# Altium PCB obc_comm.PcbDoc (part 1 of 3)
Units mm, origin at the board's own origin, x right, y up, seen from the top; angles counter-clockwise.
Board outline 95.89 x 90.17 mm, 4 copper layers (Top Signal, Ground Plane, Power Plane, Bottom Signal), stack 0.844 mm thick; 224 components, 179 nets, 944 pads, 422 vias.
Unrouted connection lines stored in the file: 348.
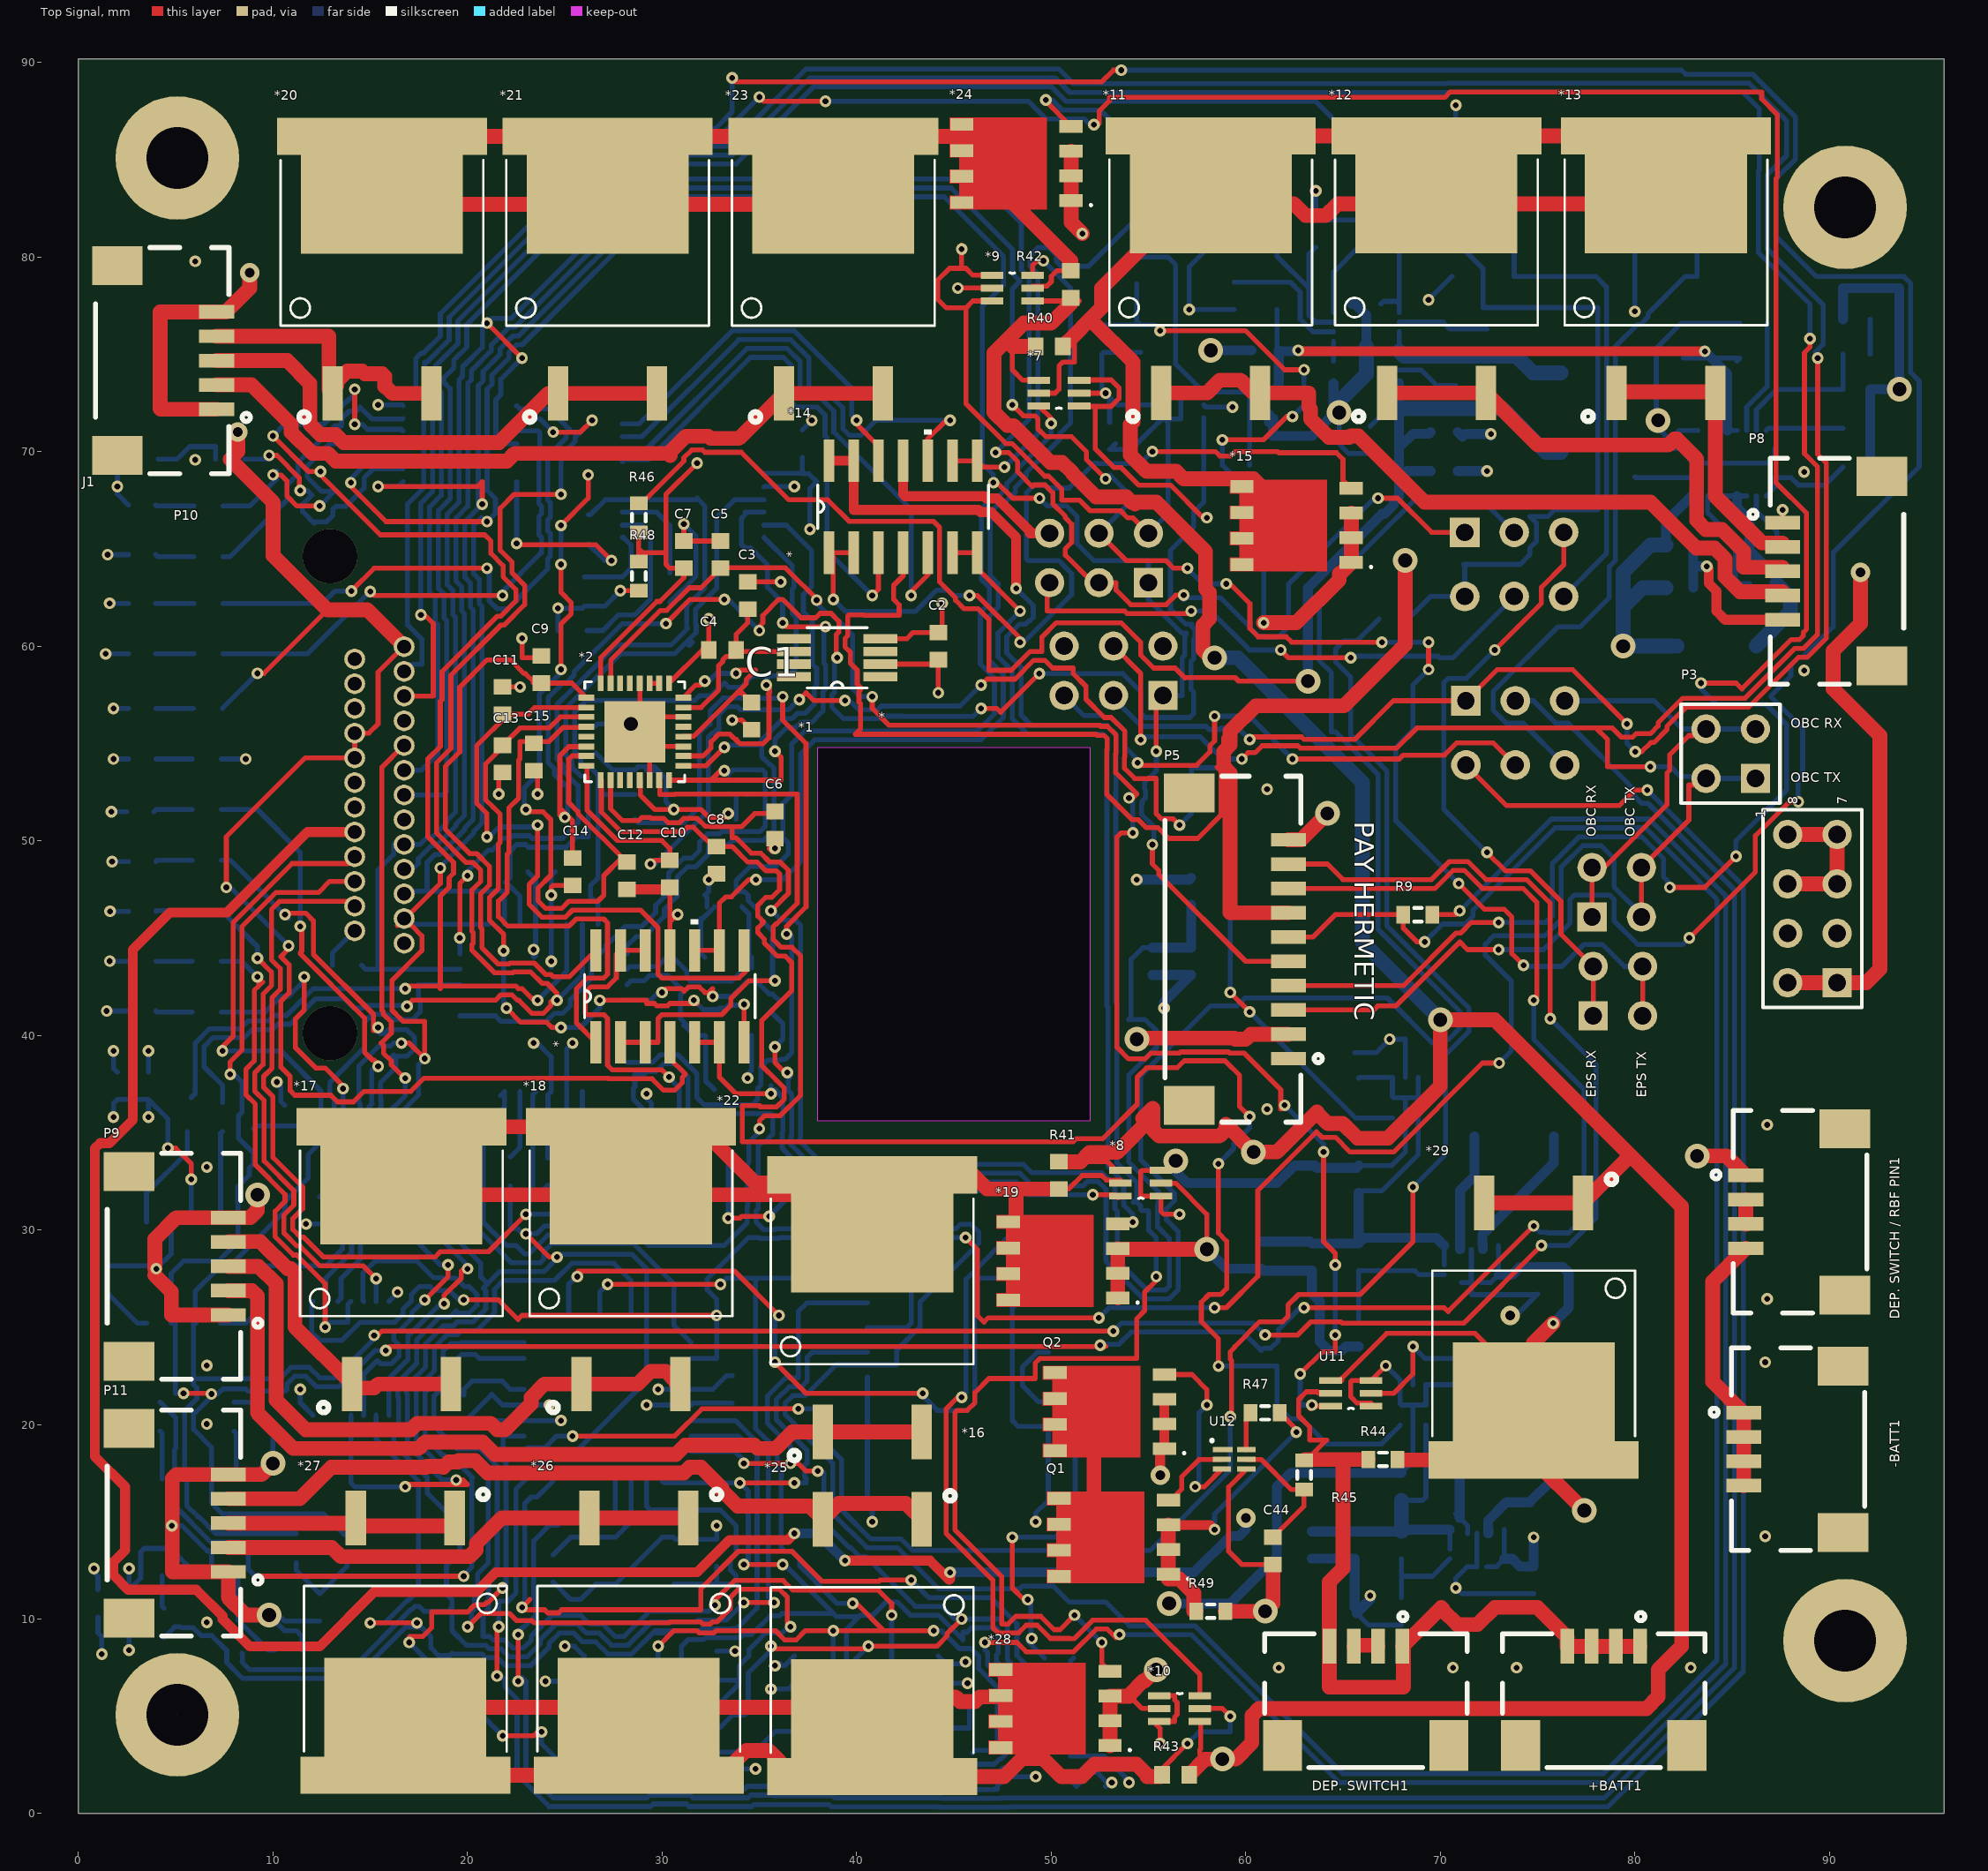
[diagram p0: Top Signal view]
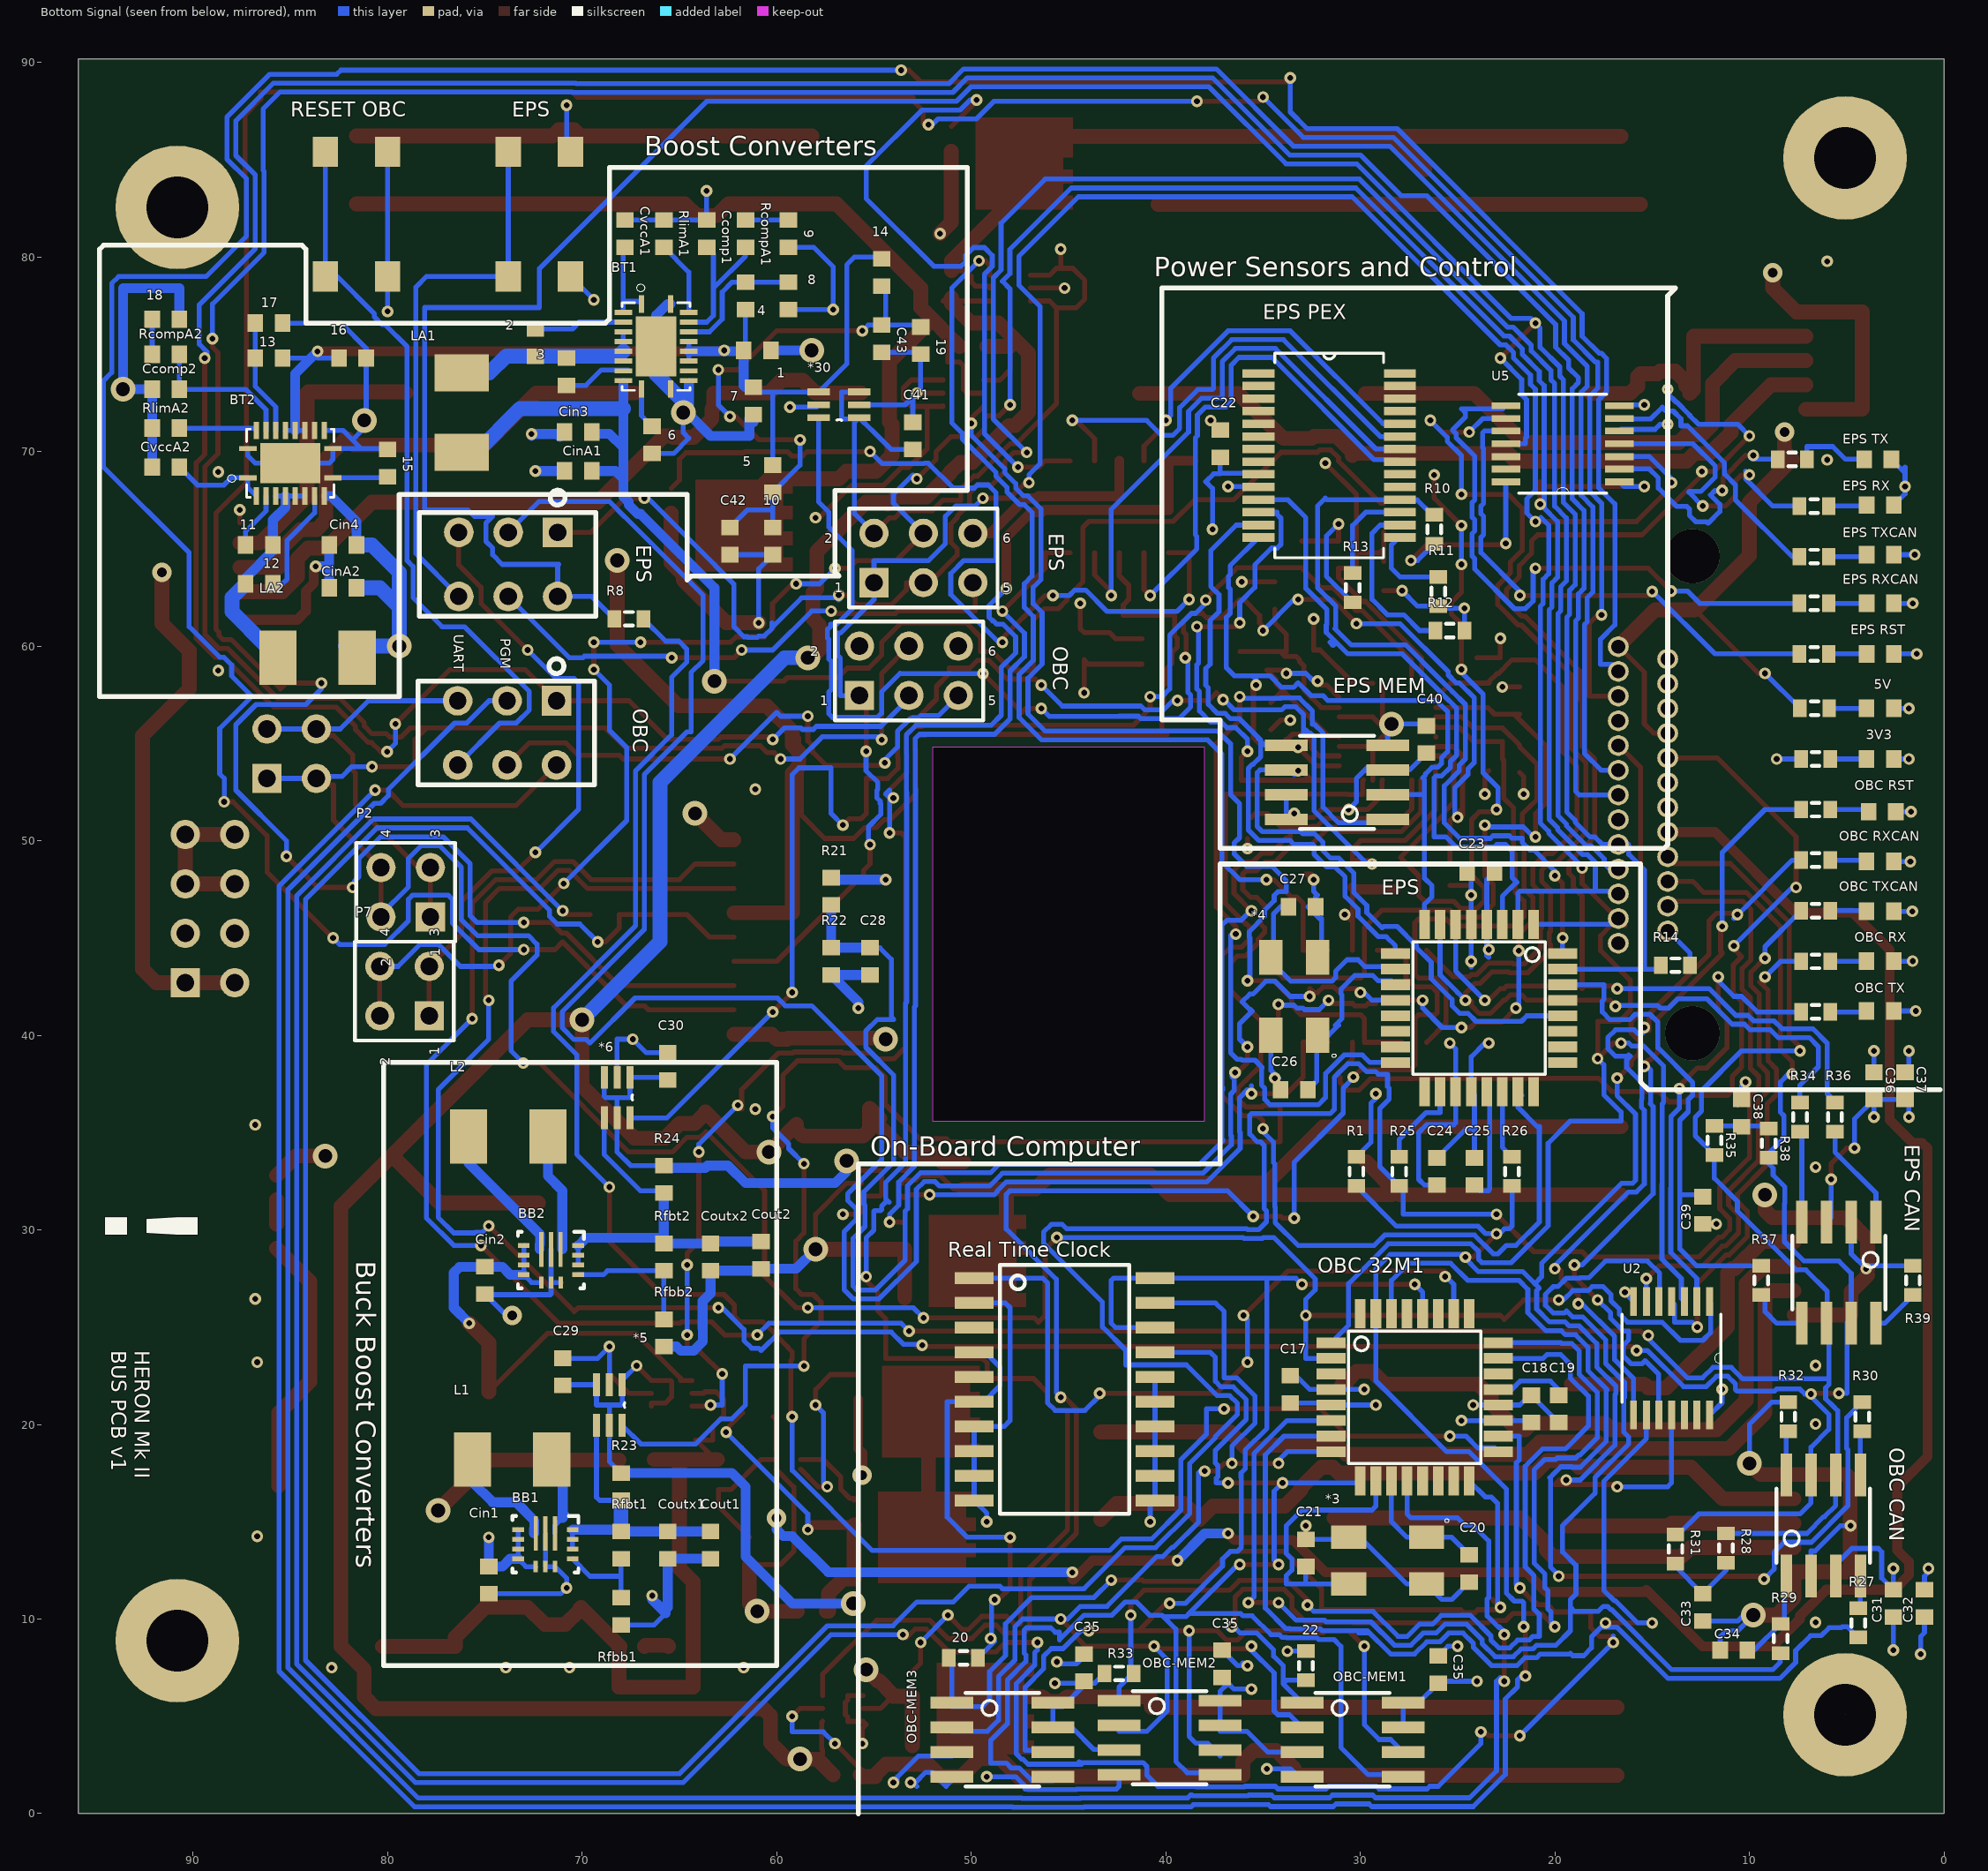
[diagram p1: Bottom Signal view, seen from below]
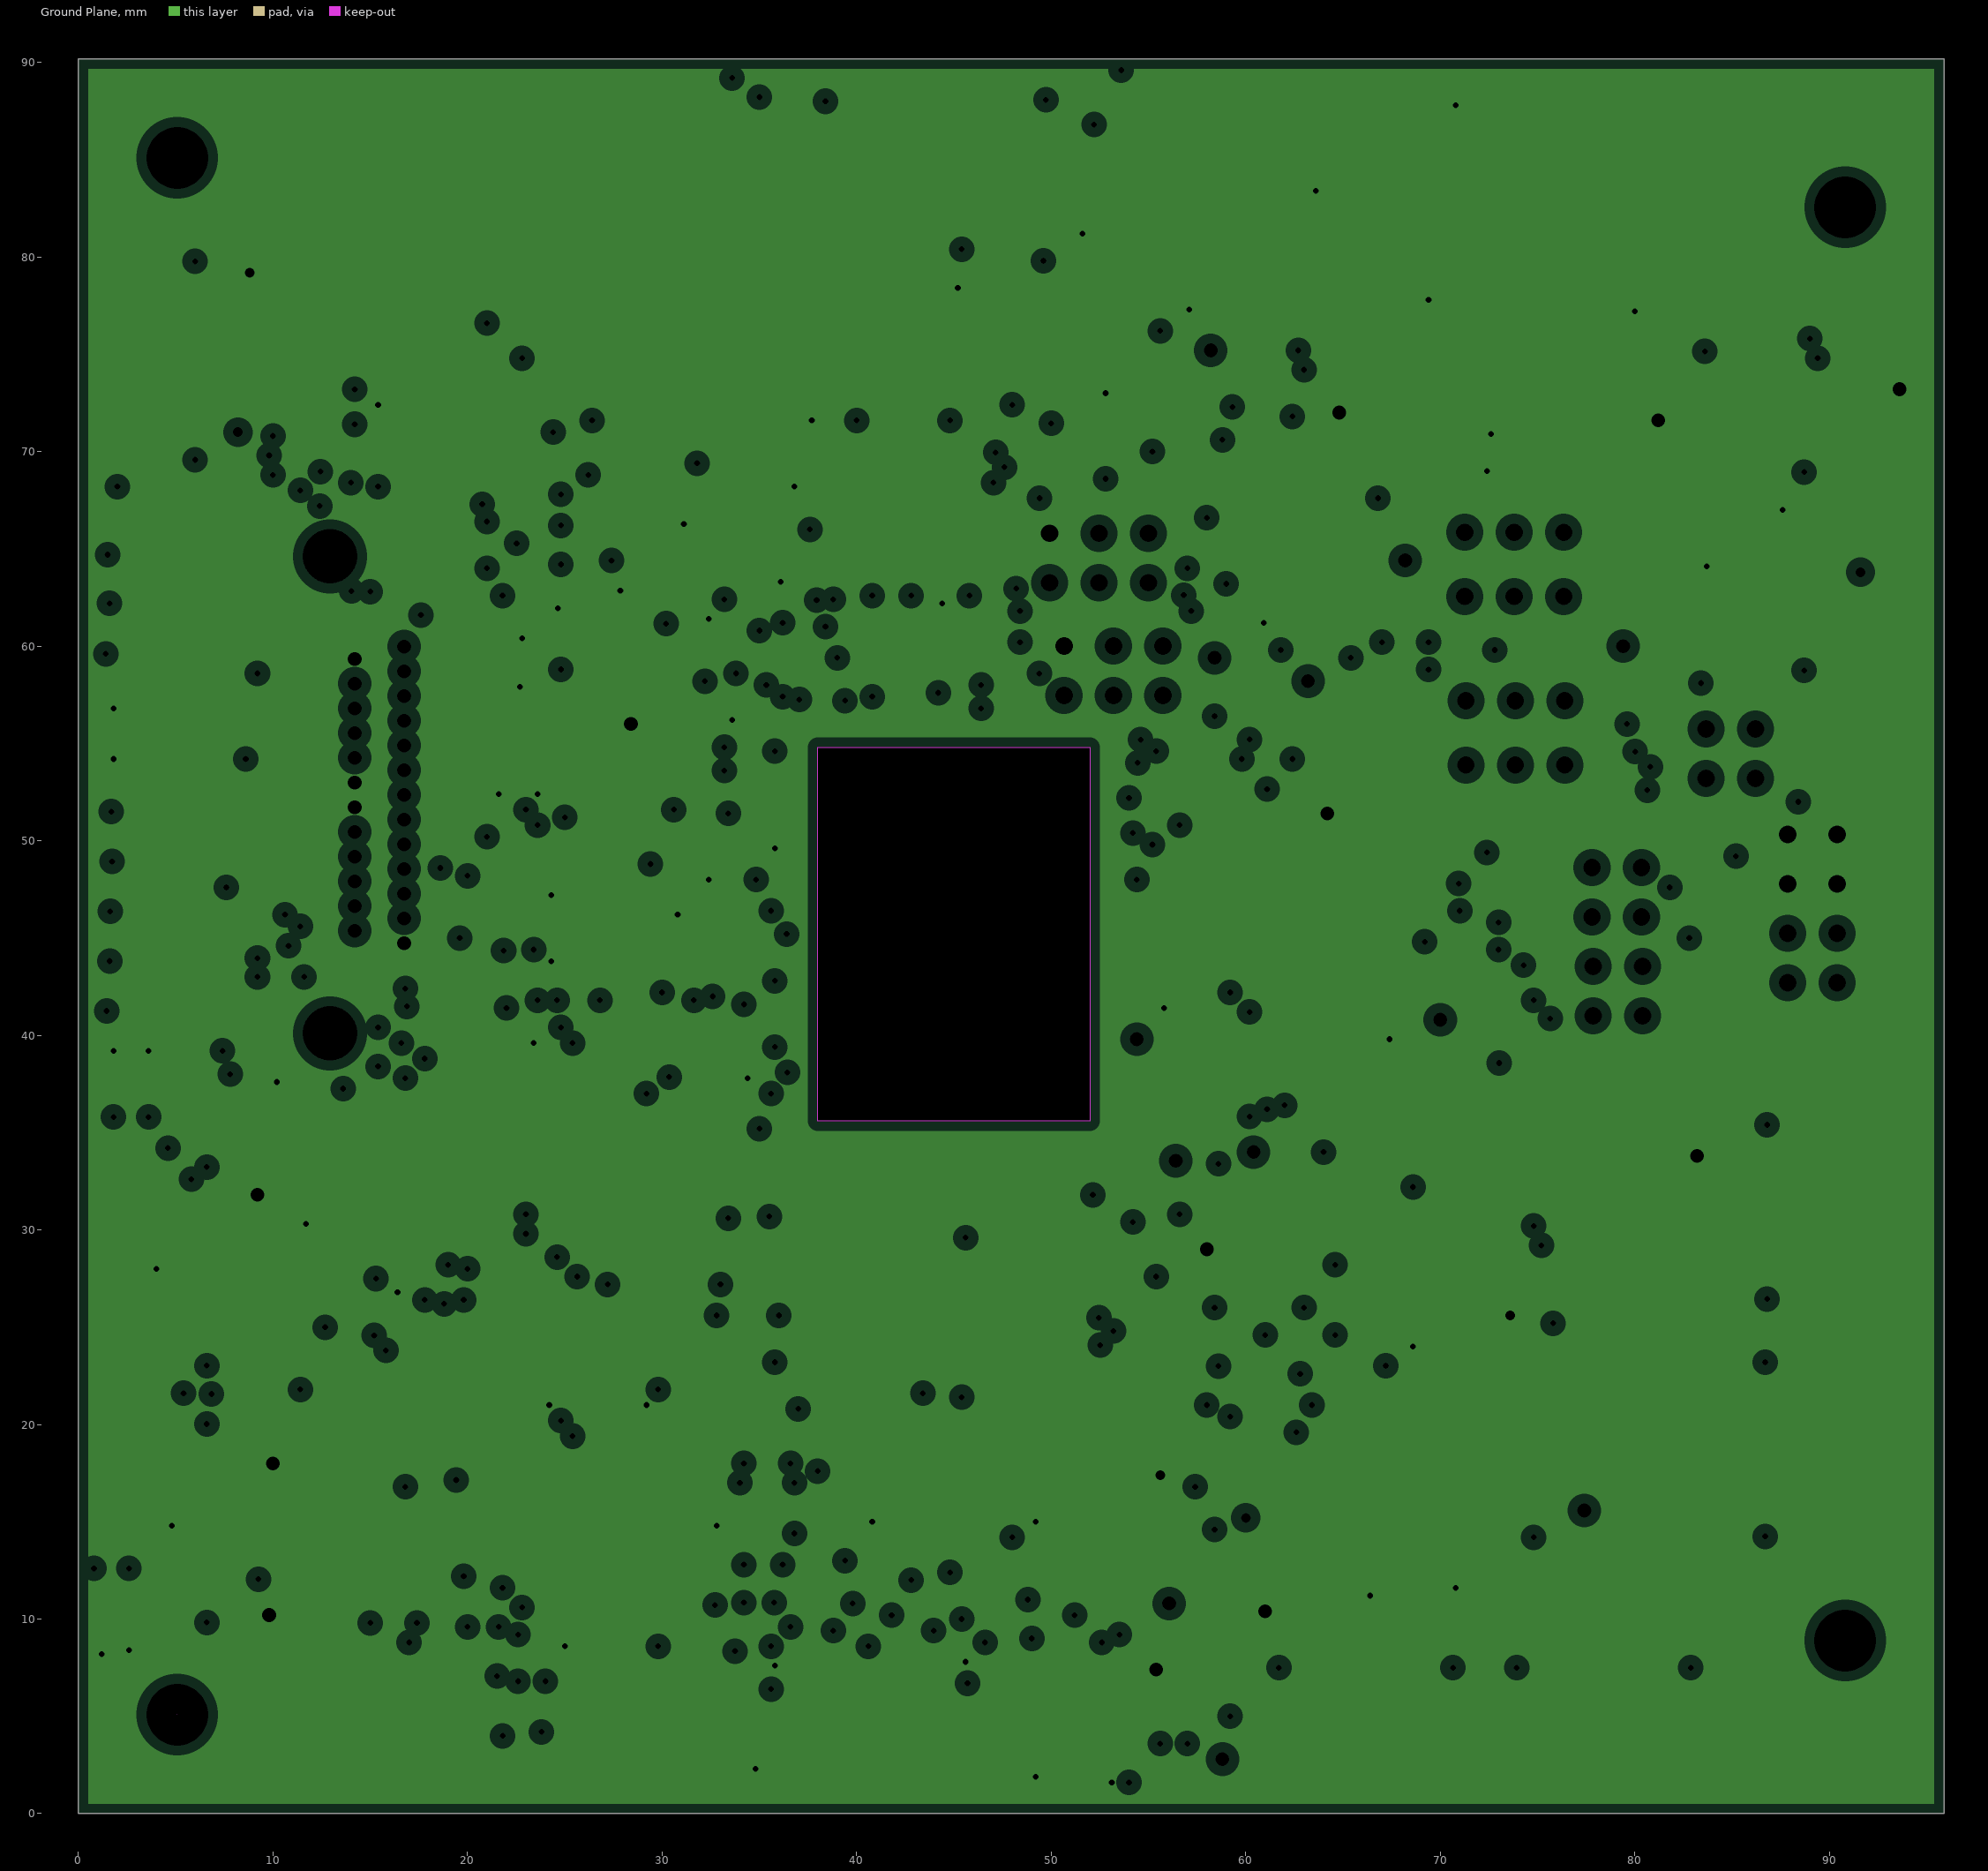
[diagram p2: Ground Plane, clearances drawn from the general rule]
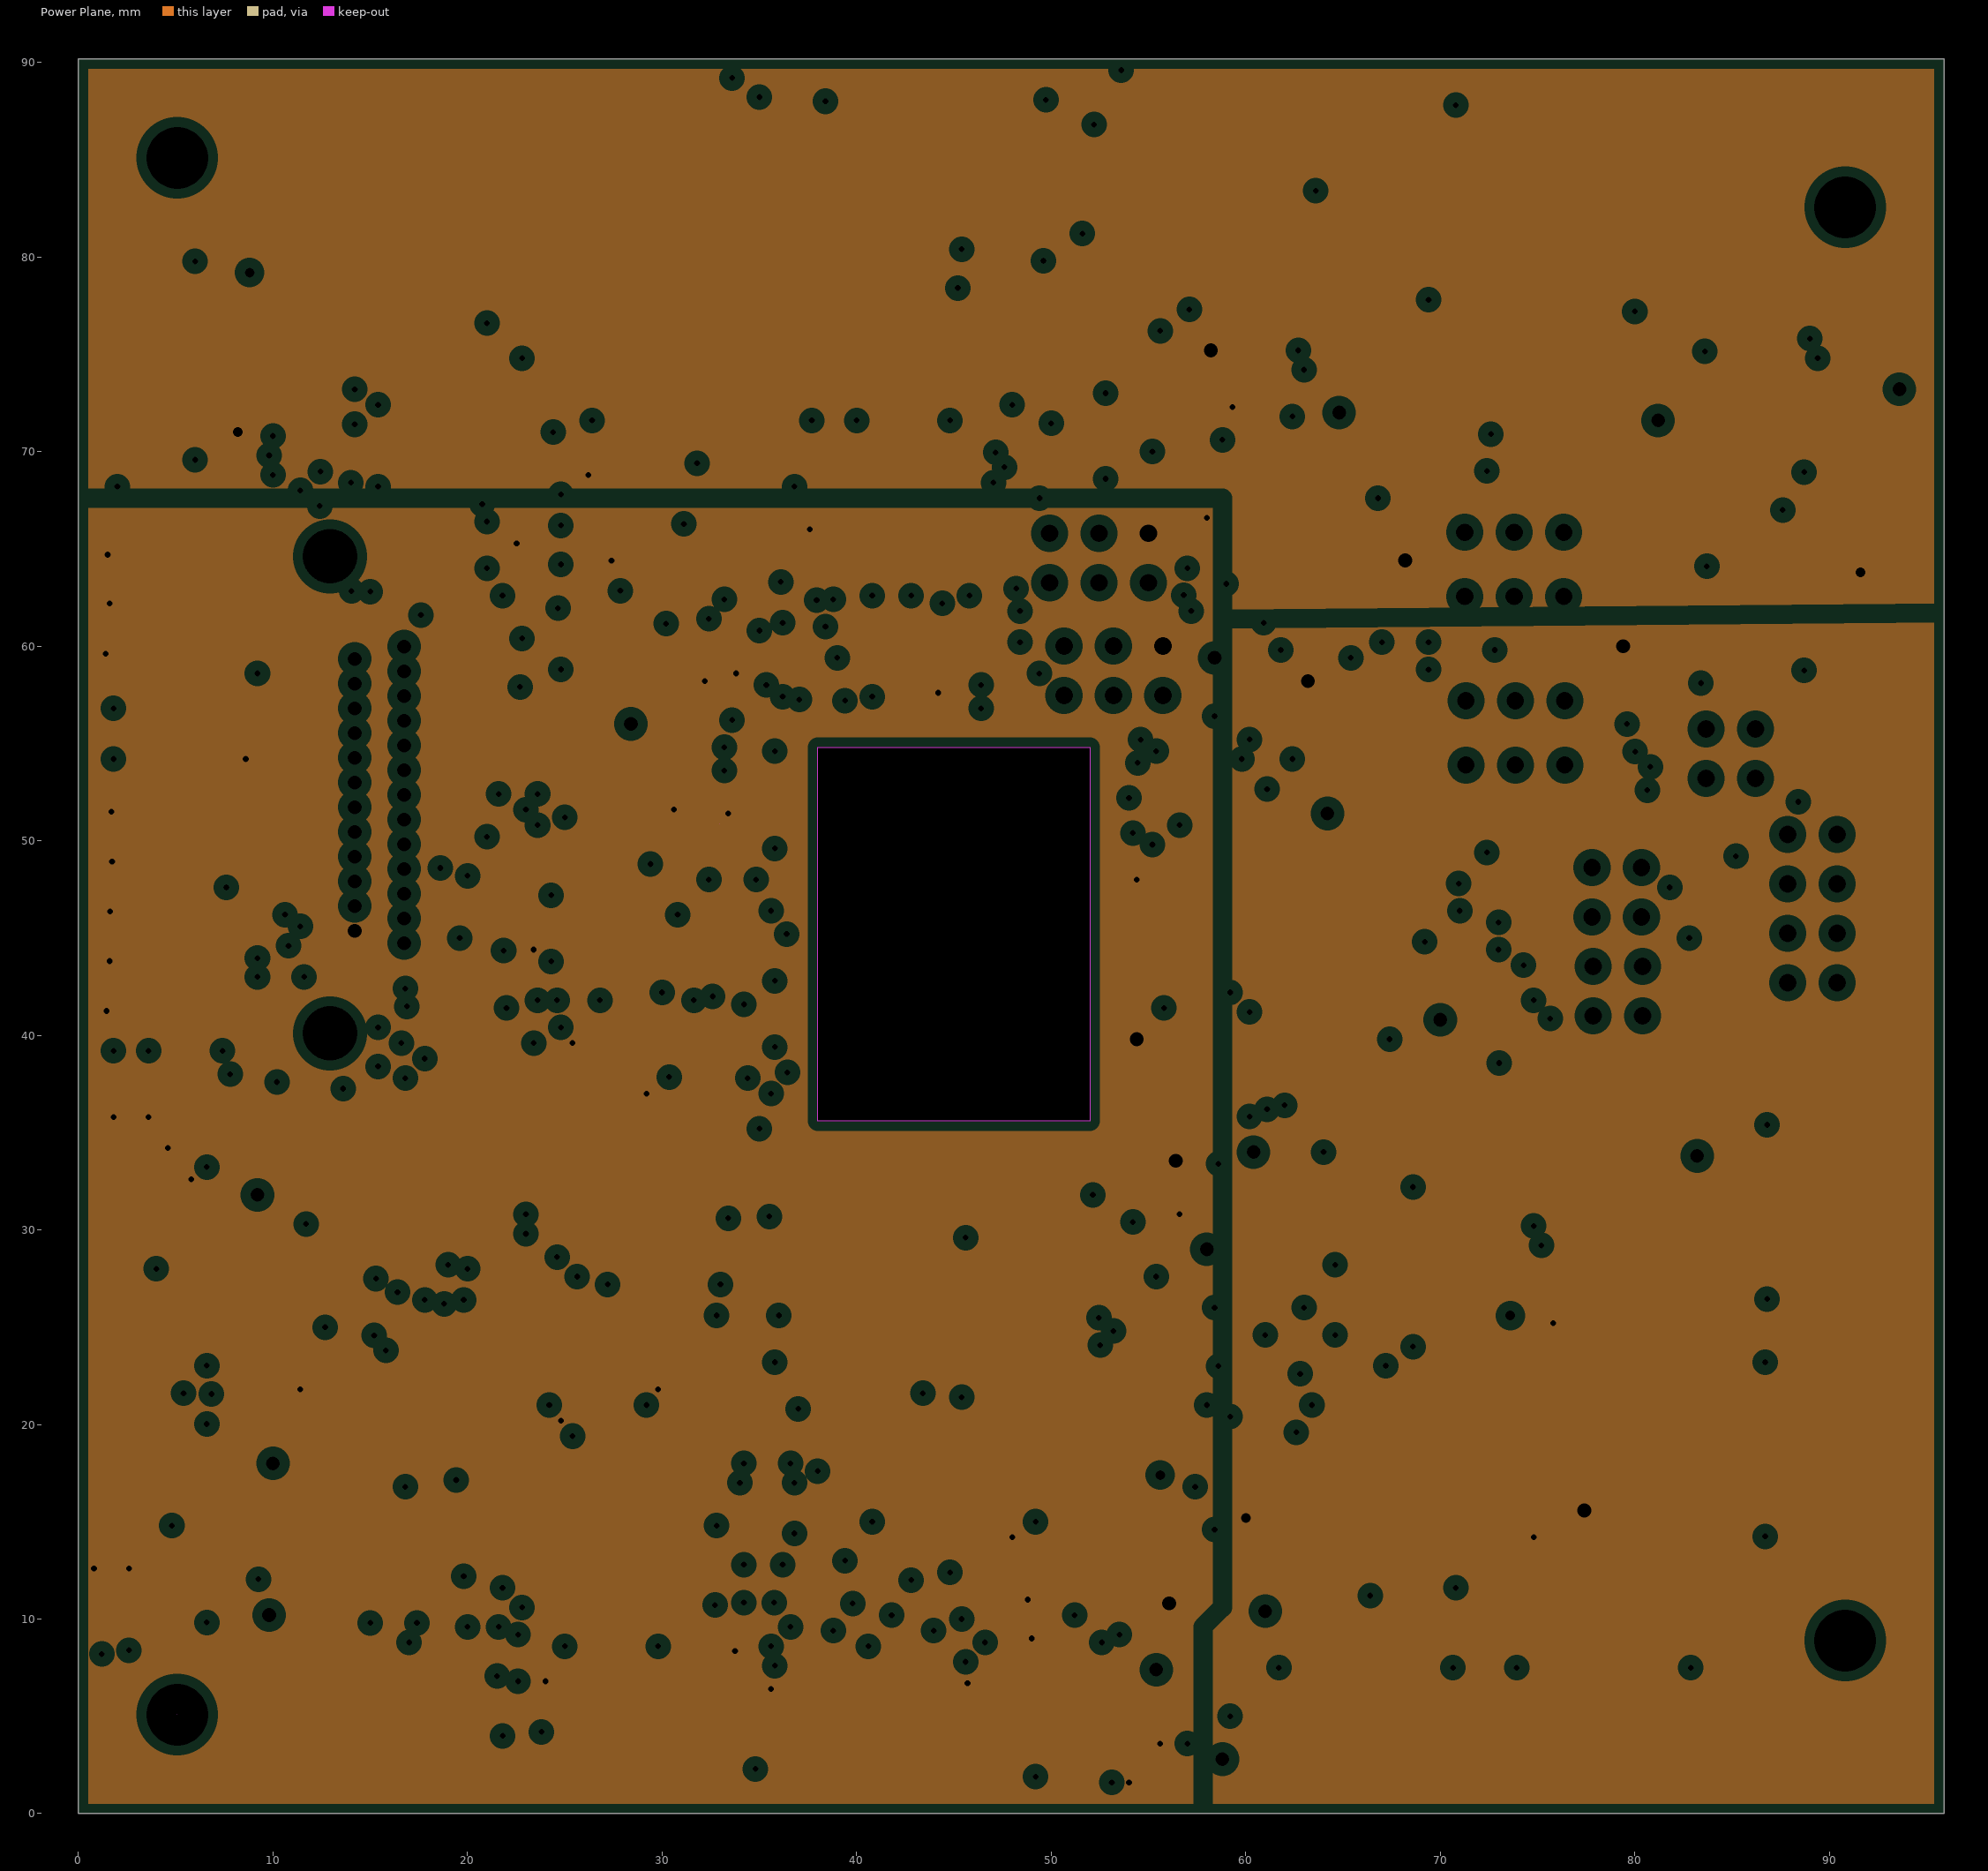
[diagram p3: Power Plane, clearances drawn from the general rule]

## Layer stack, top to bottom
Top Solder: solder mask 0.0102, Solder Resist, Dk 3.5
Top Signal: signal copper 0.0356
Dielectric 1: core 0.32, FR-4, Dk 4.8
Ground Plane: plane copper 0.036, net GND
Dielectric 3: prepreg 0.127, Dk 4.2
Power Plane: plane copper 0.036, net (Multiple Nets)
Dielectric 4: core 0.254, Dk 4.2
Bottom Signal: signal copper 0.0356
Bottom Solder: solder mask 0.0102, Solder Resist, Dk 3.5

## Board outline
0,0 0,90.17 95.89,90.17 95.89,0
cut-out: 38,35.6 38,54.8 52,54.8 52,35.6
cut-out: 5.08,5.08
cut-out: 32.967,50.85
cut-out: 5.08,5.08

## Design rules (kind name [scope] priority, off if disabled: settings)
AssemblyTestPointUsage [All] p1 off:
Clearance [All] p1: gap=0.254 ignorepadtopadclearanceinfootprint=TRUE except(0: Arc-Hole Track-Hole SMDPad-Hole THPad-Hole Via-Hole Fill-Hole Poly-Hole Region-Hole Text-Hole; 0.2: Arc-Arc Arc-Track Arc-SMDPad Track-Track Track-SMDPad)
FabricationTestPointUsage [All] p1 off: valid=0 allowmultiple=FALSE
FabricationTestpoint [All] p1 off: side=3 testpointundercomponent=TRUE minsize=1.016 maxsize=2.54 preferedsize=1.524 minholesize=0 maxholesize=1.016 preferedholesize=0.813 testpointgrid=0.025 allowsidetop=TRUE allowsidebottom=TRUE usegrid=TRUE gridtolerance=0
HoleSize [All] p1: absolutevalues=TRUE maxlimit=2.54 minlimit=0.3 maxpercent=80.000 minpercent=20.000
PlaneClearance [All] p1: clearance=0.508
PlaneConnect [All] p1: planeconnectstyle=Relief reliefexpansion=0.508 reliefentries=4 reliefconductorwidth=0.254 reliefairgap=0.254
PolygonConnect [All] p1: connectstyle=Relief reliefconductorwidth=0.254 reliefentries=4 polygonreliefangle="90 Angle" airgapwidth=0.254
RoutingVias [All] p1: holewidth=0.3 width=0.6 viastyle="Through Hole" minholewidth=0.3 minwidth=0.6 maxholewidth=0.711 maxwidth=1.27
SilkToSilkClearance [All] p1 off: silktosilkclearance=0.254
SilkToSolderMaskClearance [IsPad] p1 off: minsilkscreentomaskgap=0.254 clearancetoexposedcopper=TRUE
SolderMaskExpansion [All] p1: expansion=0.102
UnConnectedPin [All] p1 off:
UnRoutedNet UnRoutedNet_1 [All] p1:
UnRoutedNet [All] p2: checkbadconnections=TRUE
Width [All] p1: maxlimit=0.762 minlimit=0.254 preferedwidth=0.508 minimp=50.000000 maximp=50.000000 favimp=50.000000
21 further rules are at their usual default settings.

## Classes and differential pairs
component class U_obc_flash3: C35 OBC-MEM3
component class U_obc_flash2: C35 OBC-MEM2 R33
component class U_obc_flash1: C35 OBC-MEM1
component class U_eps_batt: +BATT1 -BATT1 C44 "DEP. SWITCH1" "DEP. SWITCH / RBF PIN1" Q1 Q2 R28 R45 R49 U11 U12
channel class obc_flash: U_obc_flash1 U_obc_flash2 U_obc_flash3
component class U_obc_rtc: "Real Time Clock"
component class U_obc_main_3: R8 R9
component class U_obc_can_transceiver: C23 C25 C33 C34 "OBC CAN" R28 R31 R32 R37 R38
component class U_obc_32m1: 3V3 *27 C17 C20 C40 C42 C44 C? OBC "OBC 32M1" "OBC RST" "OBC RX" "OBC RXCAN" "OBC TX" "OBC TXCAN" P10 P11 R1 R40 R41 R42 R49 "RESET OBC" U11
component class U_eps_pv: *1 *2 *5 *6 *8 *9 *10 *11 *13 *14 *15 *16 *18 *19 *21 *22 *23 *24 *25 *28 *29 *30 EPS P9 P10 P11 R41 R42
component class U_eps_pex: C17 "EPS PEX" R9 R11 R44 R45
component class U_eps_flash: C40 "EPS MEM"
component class U_eps_digital: R31
component class U_eps_can_transceiver: C34 C36 C38 C39 "EPS CAN" R34 R37 R38
component class U_eps_bt2: 1 2 3 4 5 7 10 18 19 BT2 C43 Ccomp2 Cin1 CinA2 CvccA1 RcompA2 RlimA1
component class U_eps_bt1: 2 4 5 6 7 8 9 10 13 18 *30 BT2 C34 C42 Ccomp2 Cin1 CinA2 CvccA1 RcompA2 RlimA1
component class U_eps_bb2: *6 BB2 C24 Cin2 Cout2 Coutx2 L2 R9 Rfbb2 Rfbt2
component class U_eps_bb1: *5 BB1 C17 C40 Cin1 Cout1 Coutx1 L1 R14 R22 R31 Rfbb1 Rfbt1
component class U_eps_adc: *8 *11 C1 C2 C3 C4 C5 C6 C7 C8 C9 C11 C12 C13 C14 C15
component class U_eps_32m1: *25 C17 C24 C26 C27 C43 EPS "EPS RST" "EPS RX" "EPS RXCAN" "EPS TX" "EPS TXCAN" P10 R1 R8 R14 R22 S4 U5
component class bus-main: EPS P5 P9 P?

## Components (designator, comment, footprint, x,y, rotation, side; value= is the part's Value field where it differs from the comment)
1 "R17" 1608[0603] 61,75.2 r180 bottom value=10m
2 "RtA1" 1608[0603] 72.4,75.6 r90 bottom value=267kOhm
3 "CbstA1" 1608[0603] 70.8,74.1 r270 bottom value=100nF
3V3 "LED2" 1608[0603] 3.278,54.2 r180 bottom (schematic designator D6)
4 "RfbtA1" 1608[0603] 61.6,78 r270 bottom value=220kOhm
5 "R19" 1608[0603] 60.2,68.6 r90 bottom value=R_Small
5V "Res3" J1-0603 6.65,56.8 r180 bottom value=1K (schematic designator R20)
6 "CssA1" 1608[0603] 66.4,70.6 r90 bottom
7 "CoutA1" 1608[0603] 61.2,72.6 r90 bottom value=47uF
8 "RfbbA1" 1608[0603] 59.4,78 r90 bottom value=69.8kOhm
9 "" 1608[0603] 59.4,81.2 r90 bottom value=CcompA1
10 "R20" 1608[0603] 60.2,65.4 r90 bottom value=R_Small
11 "RtA1" 1608[0603] 86.6,65.2 r0 bottom value=267kOhm
12 "CbstA1" 1608[0603] 86.6,63.2 r180 bottom value=100nF
13 "RfbtA1" 1608[0603] 86.1,74.8 r180 bottom value=220kOhm
14 "R19" 1608[0603] 54.6,79.2 r90 bottom value=R_Small
15 "CssA1" 1608[0603] 80,69.4 r270 bottom
16 "CoutA1" 1608[0603] 81.8,74.8 r0 bottom value=47uF
17 "RfbbA1" 1608[0603] 86.1,76.6 r0 bottom value=69.8kOhm
18 "" 1608[0603] 91.4,76.8 r0 bottom value=CcompA1
19 "R20" 1608[0603] 52.6,75.7 r90 bottom value=R_Small
20 "" J1-0603 50.4,8 r0 bottom value=30K
22 "" J1-0603 32.8,7.6 r90 bottom value=30K
*1 "REF5025" DGK8-M 39,59.4 r180 top
*2 "ADS7952" QFN50P500X500X100-32N 28.6,55.6 r270 top
*3 "ABM3B-8.000MHz" OSCSC500X320X110-4N 28.6,13 r270 bottom
*4 "ABM3B-8.000MHz" OSCSC500X320X110-4N 33.4,42 r0 bottom
*5 "INA214" SOT65P210X110-6N 68.6,21 r270 bottom
*6 "INA214" SOT65P210X110-6N 68.2,36.8 r270 bottom
*7 "INA214" SOT65P210X110-6N 50.4,73 r180 top
*8 "INA214" SOT65P210X110-6N 54.6,32.4 r180 top
*9 "INA214" SOT65P210X110-6N 48,78.4 r0 top
*10 "INA214" SOT65P210X110-6N 56.6,5.4 r0 top
*11 "SM74611" TO254P1435X464-3N 58.2,79.2 r90 top
*12 "SM74611" TO254P1435X464-3N 69.8,79.2 r90 top
*13 "SM74611" TO254P1435X464-3N 81.6,79.2 r90 top
*14 "ADA4891-4" R_14 42.39,67.162 r90 top
*15 "BSC026NE2LS5" INF-PG-TDSON-8-1_V 62.6,66.2 r90 top
*16 "SM74611" TO254P1435X464-3N 40.8,25.8 r90 top
*17 "SM74611" TO254P1435X464-3N 16.6,28.27 r90 top
*18 "SM74611" TO254P1435X464-3N 28.4,28.27 r90 top
*19 "BSC026NE2LS5" INF-PG-TDSON-8-1_V 50.6,28.4 r90 top
*20 "SM74611" TO254P1435X464-3N 15.6,79.175 r90 top
*21 "SM74611" TO254P1435X464-3N 27.2,79.175 r90 top
*22 "ADA4891-4" R_14 30.4,42 r90 top
*23 "SM74611" TO254P1435X464-3N 38.8,79.175 r90 top
*24 "BSC026NE2LS5" INF-PG-TDSON-8-1_V 48.2,84.8 r90 top
*25 "SM74611" TO254P1435X464-3N 40.8,8.93 r270 top
*26 "SM74611" TO254P1435X464-3N 28.8,9 r270 top
*27 "SM74611" TO254P1435X464-3N 16.8,9 r270 top
*28 "BSC026NE2LS5" INF-PG-TDSON-8-1_V 50.2,5.4 r90 top
*29 "SM74611" TO254P1435X464-3N 74.8,25.2 r270 top
*30 "INA214" SOT65P210X110-6N 56.8,72.4 r0 bottom
+BATT1 "J5" DF14-4P-1.25H(55) 78.4,8.6 r180 top
-BATT1 "J6" DF14-4P-1.25H(55) 85.6,18.725 r270 top
BB1 "TPS630250" RNC0014A 71.89,13.845 r270 bottom
BB2 "TPS630250" RNC0014A 71.6,28.445 r270 bottom
BT1 "TPS61088" QFN50P450X350X100-21N 66.2,75.4 r180 bottom
BT2 "TPS61088" QFN50P450X350X100-21N 85,69.4 r90 bottom
C1 "Cap Semi" 1608[0603] 34.6,56.4 r270 top value=1uF
C2 "Cap Semi" 1608[0603] 44.2,60 r270 top value=1uF
C3 "Cap Semi" 1608[0603] 34.4,62.6 r270 top value=1uF
C4 "Cap Semi" 1608[0603] 33.1,59.8 r180 top value=10uF
C5 "Cap Semi" 1608[0603] 33,64.7 r90 top value=150pF
C6 "Cap Semi" 1608[0603] 35.8,50.8 r270 top value=150pF
C7 "Cap Semi" 1608[0603] 31.12,64.7 r90 top value=150pF
C8 "Cap Semi" 1608[0603] 32.8,49 r270 top value=150pF
C9 "Cap Semi" 1608[0603] 23.8,58.8 r90 top value=150pF
C10 "Cap Semi" 1608[0603] 30.4,48.3 r270 top value=150pF
C11 "Cap Semi" 1608[0603] 21.8,57.2 r90 top value=150pF
C12 "Cap Semi" 1608[0603] 28.2,48.2 r270 top value=150pF
C13 "Cap Semi" 1608[0603] 21.8,54.2 r270 top value=150pF
C14 "Cap Semi" 1608[0603] 25.4,48.4 r270 top value=150pF
C15 "Cap Semi" 1608[0603] 23.4,54.3 r270 top value=150pF
C17 "Cap Semi" 1608[0603] 33.6,21.8 r90 bottom value=0.1uF
C18 "Cap Semi" 1608[0603] 21.2,20.8 r270 bottom value=0.1uF
C19 "Cap Semi" 1608[0603] 19.8,20.8 r270 bottom value=0.1uF
C20 "1%" 1608[0603] 24.4,12.6 r90 bottom value=22pF
C21 "1%" 1608[0603] 32.8,13.4 r270 bottom value=22pF
C22 "Cap Semi" 1608[0603] 37.2,70.4 r270 bottom value=100nF
C23 "Cap Semi" 1608[0603] 23.8,48.4 r180 bottom value=0.1uF
C24 "Cap Semi" 1608[0603] 26.067,33 r270 bottom value=0.1uF
C25 "Cap Semi" 1608[0603] 24.133,33 r90 bottom value=0.1uF
C26 "1%" 1608[0603] 33.4,37.2 r180 bottom value=22pF
C27 "1%" 1608[0603] 33,46.6 r0 bottom value=22pF
C28 "Cap" 1608[0603] 55.2,43.8 r90 bottom value=Csmall
C29 "Cap Semi" 1608[0603] 71,22.7 r270 bottom value=0.1uF
C30 "Cap Semi" 1608[0603] 65.6,38.4 r270 bottom value=0.1uF
C31 "Cap Semi" 1608[0603] 2.6,10.8 r90 bottom value=10uF
C32 "Cap Semi" 1608[0603] 1,10.8 r90 bottom value=0.1uF
C33 "Ceramic" 1608[0603] 12.4,10.6 r90 bottom value="47 nF"
C34 "0.1uF" 1608[0603] 10.8,8.4 r180 bottom
C35 "Cap Semi" 1608[0603] 44.2,7.5 r90 bottom value=100nF
C35 "Cap Semi" 1608[0603] 37.1,7.7 r90 bottom value=100nF
C35 "Cap Semi" 1608[0603] 26,7.4 r90 bottom value=100nF
C36 "Cap Semi" 1608[0603] 3.6,37.4 r270 bottom value=10uF
C37 "Cap Semi" 1608[0603] 2,37.4 r270 bottom value=0.1uF
C38 "Ceramic" 1608[0603] 10.4,36 r270 bottom value="47 nF"
C39 "0.1uF" 1608[0603] 12.4,31 r90 bottom
C40 "Cap Semi" 1608[0603] 26.6,55.2 r90 bottom value=100nF
C41 "Cap Semi" 1608[0603] 53,70.8 r270 bottom value=0.1uF
C42 "" 1608[0603] 62.4,65.4 r270 bottom value=C_Small
C43 "" 1608[0603] 54.6,75.8 r270 bottom value=C_Small
C44 "Cap Semi" 1608[0603] 61.4,13.5 r90 top value=0.1uF
Ccomp1 "" 1608[0603] 63.6,81.2 r270 bottom value=82pF
Ccomp2 "" 1608[0603] 91.4,73.2 r180 bottom value=82pF
Cin1 "Cap" 1608[0603] 74.8,12 r90 bottom value=10.0µF
Cin2 "Cap" 1608[0603] 75,27.4 r90 bottom value=10.0µF
Cin3 "" 1608[0603] 70.2,71 r180 bottom value=100nF
Cin4 "" 1608[0603] 82.3,65.2 r180 bottom value=100nF
CinA1 "" 1608[0603] 70.2,69 r180 bottom value=12uF
CinA2 "" 1608[0603] 82.3,63 r180 bottom value=12uF
Cout1 "Cap" 1608[0603] 63.4,13.8 r90 bottom value=47.0µF
Cout2 "Cap" 1608[0603] 60.8,28.7 r90 bottom value=47.0µF
Coutx1 "Cap" 1608[0603] 65.6,13.8 r90 bottom value=10.0µF
Coutx2 "Cap" 1608[0603] 63.4,28.6 r90 bottom value=10.0µF
CvccA1 "" 1608[0603] 67.8,81.2 r270 bottom value=1uF
CvccA2 "" 1608[0603] 91.4,69.2 r180 bottom value=1uF
D12 "LED2" 1608[0603] 3.278,56.8 r180 bottom
"DEP. SWITCH1" "Header 4" DF14-4P-1.25H(55) 66.175,8.6 r180 top
"DEP. SWITCH / RBF PIN1" "Header 4" DF14-4P-1.25H(55) 85.7,30.925 r270 top
Designator1 "Comment" OSCSC500X320X110-4N 184.6,2508.4 r0 top
EPS "SW-DPDT" DPST_32m1_switch 73.8,64.2 r270 bottom (schematic designator S3)
EPS "ATMega32M1" QFP80P900X900X120-32N 23.9,41.4 r270 bottom (schematic designator U4)
EPS "SW-PB" SW415-ND 72.2,82.2 r90 bottom (schematic designator S4)
EPS "3x2 Male/IDC" HDR2X3 55,63.26 r180 bottom (schematic designator P6)
"EPS CAN" "SN65HVD233D" SOIC127P500X600-8N 5.4,27.8 r0 bottom (schematic designator U8)
"EPS MEM" "SST26VF016B" SOIC127P500X600-8N 31.2,53 r90 bottom (schematic designator U9)
"EPS PEX" "MCP23S17" SOP65P780X200-28N 31.6,69.8 r180 bottom (schematic designator U3)
"EPS RST" "RST" 1608[0603] 3.273,59.6 r0 bottom (schematic designator D7)
"EPS RX" "RXLIN" 1608[0603] 3.273,67.25 r0 bottom (schematic designator D10)
"EPS RXCAN" "RXCAN" 1608[0603] 3.273,62.2 r0 bottom (schematic designator D8)
"EPS TX" "TXLIN" 1608[0603] 3.4,69.6 r0 bottom (schematic designator D11)
"EPS TXCAN" "TXCAN" 1608[0603] 3.273,64.7 r0 bottom (schematic designator D9)
J1 "D Connector 25" "Mini DSub Connector" 16.74,52.355 r90 top
L1 "Inductor" 541-1082-1-ND 73.6,18.2 r180 bottom value=1.0µH
L2 "Inductor" 541-1082-1-ND 73.8,34.8 r180 bottom value=1.0µH
LA1 "" 541-1082-1-ND 76.2,72 r90 bottom value=2.2uH
LA2 "" 541-1082-1-ND 83.6,59.4 r0 bottom value=2.2uH
OBC "SW-DPDT" DPST_32m1_switch 73.86,55.54 r270 bottom (schematic designator S1)
OBC "3x2 Male/IDC" HDR2X3 55.74,57.46 r180 bottom (schematic designator P1)
"OBC 32M1" "ATMega32M1" QFP80P900X900X120-32N 27.2,21.4 r180 bottom (schematic designator U1)
"OBC CAN" "SN65HVD233D" SOIC127P500X600-8N 6.2,14.8 r180 bottom (schematic designator U6)
"OBC RST" "RST" 1608[0603] 3.178,51.49 r0 bottom (schematic designator D1)
"OBC RX" "RXLIN" 1608[0603] 3.278,43.81 r0 bottom (schematic designator D4)
"OBC RXCAN" "RXCAN" 1608[0603] 3.278,48.93 r0 bottom (schematic designator D2)
"OBC TX" "UHF PWR" HDR2X4 90.4,42.7 r90 top (schematic designator P4)
"OBC TX" "TXLIN" 1608[0603] 3.278,41.25 r0 bottom (schematic designator D5)
"OBC TXCAN" "TXCAN" 1608[0603] 3.278,46.37 r0 bottom (schematic designator D3)
OBC-MEM1 "SST26VF016B" SOIC127P500X600-8N 30.4,3.8 r270 bottom (schematic designator U7)
OBC-MEM2 "SST26VF016B" SOIC127P500X600-8N 39.8,3.9 r270 bottom (schematic designator U7)
OBC-MEM3 "SST26VF016B" SOIC127P500X600-8N 48.4,3.8 r270 bottom (schematic designator U7)
P2 "2x2 Female" HDR2X2 77.8,46.08 r90 bottom
P3 "UHF UART" HDR2X2 86.2,53.2 r90 top
P5 "Header 10" "DF14-10P-1.25H(55) - duplicate" 62.2,44.425 r90 top
P7 "2x2 Female" HDR2X2 77.86,41 r90 bottom
P8 "Header 5" "DF14-4P-1.25H(55) - duplicate" 87.6,63.85 r270 top
P9 "Header 5" "DF14-4P-1.25H(55) - duplicate" 7.7,28.125 r90 top
P10 "Header 5" "DF14-4P-1.25H(55) - duplicate" 7.1,74.675 r90 top
P11 "Header 5" "DF14-4P-1.25H(55) - duplicate" 7.7,14.925 r90 top
Q1 "BSC026NE2LS5" INF-PG-TDSON-8-1_V 53.2,14.2 r90 top
Q2 "BSC026NE2LS5" INF-PG-TDSON-8-1_V 52.994,20.66 r90 top
R1 "" J1-0603 30.2,33 r90 bottom value=30K
R2 "Res3" J1-0603 6.6,51.6 r180 bottom value=330
R3 "Res3" J1-0603 6.6,49 r180 bottom value=330
R4 "Res3" J1-0603 6.6,46.4 r180 bottom value=330
R5 "Res3" J1-0603 6.6,43.8 r180 bottom value=330
R6 "Res3" J1-0603 6.6,41.2 r180 bottom value=330
R7 "Res3" J1-0603 6.6,54.2 r180 bottom value=1K
R8 "Res3" J1-0603 67.6,61.4 r180 bottom value=0
R9 "Res3" J1-0603 68.85,46.2 r0 top value=0
R10 "Res3" J1-0603 26.2,66 r90 bottom value=10K
R11 "Res3" J1-0603 26,62.8 r90 bottom value=1K
R12 "Res3" J1-0603 25.4,60.8 r0 bottom value=10K
R13 "Res3" J1-0603 30.4,63 r90 bottom value=10K
R14 "" J1-0603 13.8,43.6 r180 bottom value=30K
R15 "Res3" J1-0603 6.673,59.6 r180 bottom value=330
R16 "Res3" J1-0603 6.673,62.2 r180 bottom value=330
R17 "Res3" J1-0603 6.673,64.6 r180 bottom value=330
R18 "Res3" J1-0603 6.673,67.2 r180 bottom value=330
R19 "Res3" J1-0603 7.8,69.6 r180 bottom value=330
R21 "Res1" 1608[0603] 57.2,47.4 r270 bottom value=Rsmall
R22 "Res1" 1608[0603] 57.2,43.8 r270 bottom value=Rsmall
R23 "Res1" 1608[0603] 68,16.8 r90 bottom value=10mO
R24 "Res1" 1608[0603] 65.8,32.6 r90 bottom value=10mO
R25 "Res3" J1-0603 28,33 r90 bottom value=0
R26 "Res3" J1-0603 22.2,33 r90 bottom value=0
R27 "" J1-0603 4.4,9.8 r270 bottom value=100
R28 "0603" J1-0603 11.2,13.65 r270 bottom value="60 Ohm"
R29 "" J1-0603 8.4,9 r270 bottom value=100
R30 "100" J1-0603 4.2,20.4 r90 bottom
R31 "0603" J1-0603 13.8,13.6 r270 bottom value=60
R32 "" J1-0603 8,20.4 r270 bottom value="0 Ohm"
R33 "" J1-0603 42.4,7.2 r0 bottom value=30K
R34 "" J1-0603 7.4,35.8 r90 bottom value=100
R35 "0603" J1-0603 11.8,34.6 r90 bottom value="60 Ohm"
R36 "" J1-0603 5.6,35.8 r90 bottom value=100
R37 "100" J1-0603 9.4,27.4 r90 bottom
R38 "0603" J1-0603 9,34.45 r90 bottom value=60
R39 "" J1-0603 1.6,27.4 r270 bottom value="0 Ohm"
R40 "Res1" 1608[0603] 49.9,75.4 r180 top value=10mO
R41 "Res1" 1608[0603] 50.4,32.8 r90 top value=10mO
R42 "Res1" 1608[0603] 51,78.6 r270 top value=10mO
R43 "Res1" 1608[0603] 56.4,2 r0 top value=10mO
R44 "Res3" J1-0603 67.05,18.2 r180 top value=10m
R45 "Res3" J1-0603 63,17.4 r90 top value=330
R46 "Res3" J1-0603 28.8,66.6 r90 top
R47 "Res3" J1-0603 61,20.6 r180 top value=2.2K
R48 "Res3" J1-0603 28.8,63.6 r90 top
R49 "Res3" J1-0603 58.2,10.4 r0 top value=0
RcompA1 "" 1608[0603] 61.6,81.2 r270 bottom value=15.8kOhm
RcompA2 "" 1608[0603] 91.4,75 r180 bottom value=15.8kOhm
"Real Time Clock" "DS3234" SOIC127P1032X265-20N 45.2,21.8 r180 bottom (schematic designator U10)
"RESET OBC" "SW-PB" SW415-ND 81.6,82.2 r90 bottom (schematic designator S2)
Rfbb1 "Res1" 1608[0603] 68,10.4 r90 bottom value=180kO
Rfbb2 "Res1" 1608[0603] 65.8,24.7 r90 bottom value=180kO
Rfbt1 "Rfbt1" 1608[0603] 68,13.8 r270 bottom value=562kO
Rfbt2 "Rfbt1" 1608[0603] 65.8,28.6 r270 bottom value=562kO
RlimA1 "" 1608[0603] 65.8,81.2 r270 bottom value=162kOhm
RlimA2 "" 1608[0603] 91.4,71.2 r180 bottom value=162kOhm
U2 "SN54LV07A" SOP65P640X120-14N 14,23.4 r270 bottom
U5 "SN54LV07A" SOP65P640X120-14N 19.6,70.4 r0 bottom
U11 "INA214" SOT65P210X110-6N 65.4,21.6 r180 top
U12 "BQ297xx" "SON50P150X150X80-6N - duplicate1" 59.4,18.2 r0 top

## Footprints (in the part's own frame and the unit in brackets; to place one, negate y for a bottom-side part, rotate by r counter-clockwise, add the part's x,y. Pads: shape width x height; smd on the part's side, far side on the other; paste and mask are expansions set on the pad)
541-1082-1-ND [mm]
  rect 1.915x2.79 smd: 1(-2.037,0) 2(2.037,0)
1608[0603] [mm] "Chip Capacitor, Body 1.6x0.8mm, IPC High Density"
  rect 0.8x0.9 smd: 1(-0.7,0) 2(0.7,0)
  body extent -0.87,-0.48 0.87,0.48, height 1.3
DF14-4P-1.25H(55) [mm]
  rect 0.7x1.8 smd: 1(-1.875,0) 2(-0.625,0) 3(0.625,0) 4(1.875,0)
  rect 2x2.6 smd: ""(-4.275,5.1) ""(4.275,5.1)
  silkscreen extent -5.21,-1.73 5.21,6.22
"DF14-4P-1.25H(55) - duplicate" [mm]
  rect 0.7x1.8 smd: 1(-2.5,0) 2(-1.25,0) 3(0,0) 4(1.25,0) 5(2.5,0)
  rect 2x2.6 smd: ""(-4.875,5.1) ""(4.875,5.1)
  silkscreen extent -5.81,-1.73 5.81,6.22
"DF14-10P-1.25H(55) - duplicate" [mm]
  rect 0.7x1.8 smd: 1(-5.625,0) 2(-4.375,0) 3(-3.125,0) 4(-1.875,0) 5(-0.625,0) 6(0.625,0) 7(1.875,0) 8(3.125,0) 9(4.375,0) 10(5.625,0)
  rect 2x2.6 smd: ""(-8.025,5.1) ""(8.025,5.1)
  silkscreen extent -8.89,-1.73 8.89,6.35
DGK8-M [mil]
  rect 68x19 smd: 1(-87.5,38.39) 2(-87.5,12.8) 3(-87.5,-12.8) 4(-87.5,-38.39) 5(87.5,-38.39) 6(87.5,-12.8) 7(87.5,12.8) 8(87.5,38.39)
  silkscreen extent -61,-61 61,61, body extent 0,0 10,10, height 10
DPST_32m1_switch [mil]
  rect 60x60 hole 35: 1(-65,100)
  round 60 hole 35: 2(-65,0) 3(-65,-100) 4(65,100) 5(65,0) 6(65,-100)
  silkscreen extent -150,-180 105,177
HDR2X2 [mm] "Connector; Header; 2x2 Position"
  rect 1.5x1.5 hole 0.9: 1(0,0)
  round 1.5 hole 0.9: 2(0,2.54) 3(2.54,0) 4(2.54,2.54)
  silkscreen extent -1.27,-1.27 3.81,3.81
HDR2X3 [mm] "Connector; Header; 3x2 Position"
  rect 1.5x1.5 hole 0.9: 1(0,0)
  round 1.5 hole 0.9: 2(0,2.54) 3(2.54,0) 4(2.54,2.54) 5(5.08,0) 6(5.08,2.54)
  silkscreen extent -1.27,-1.27 6.35,3.81
HDR2X4 [mm] "Connector; Header; 4x2 Position"
  rect 1.5x1.5 hole 0.9: 1(0,0)
  round 1.5 hole 0.9: 2(0,2.54) 3(2.54,0) 4(2.54,2.54) 5(5.08,0) 6(5.08,2.54) 7(7.62,0) 8(7.62,2.54)
  silkscreen extent -1.27,-1.27 8.89,3.81
INF-PG-TDSON-8-1_V [mm] "TDSON, 8-Leads, Body 6.15x5.15mm, Pitch 1.27mm"
  rect 0.65x1.2 smd: 1(-1.905,-2.825) 1(-0.635,-2.825) 1(0.635,-2.825) 2(1.905,-2.825) 3(-2.007,2.794) 3(-0.66,2.794) 3(0.66,2.794) 3(2.007,2.794)
  Top Signal region: -2.35,2.925 -2.35,-1.575 2.35,-1.575 2.35,2.925
  Top Signal region: -2.35,2.925 -1.65,2.925 -1.65,3.425 -2.35,3.425
  Top Signal region: 1.65,2.925 2.35,2.925 2.35,3.425 1.65,3.425
  Top Signal region: -1.015,2.925 -0.315,2.925 -0.315,3.425 -1.015,3.425
  Top Signal region: 0.315,2.925 1.015,2.925 1.015,3.425 0.315,3.425
  silkscreen extent -2.23,-3.94 -2.03,-3.74, body extent -2.58,-3.08 2.58,3.08, height 1
J1-0603 [mm] "Chip Resistor, Body 1.6x0.8mm, IPC High Density"
  rect 0.7x0.9 smd: 1(-0.75,0) 2(0.75,0)
  silkscreen extent -0.2,-0.35 0.2,0.35, body extent -0.85,-0.48 0.85,0.48, height 0.9
"Mini DSub Connector" [mil]
  round 42 hole 28: 1(-300,0) 2(-250,0) 3(-200,0) 4(-150,0) 5(-100,0) 6(-50,0) 7(0,0) 8(50,0) 9(100,0) 10(150,0) 11(200,0) 12(250,0) 13(300,0) 14(-275,100) 15(-225,100) 16(-175,100) 17(-125,100) 18(-75,100) 19(-25,100) 20(25,100) 21(75,100) 22(125,100) 23(175,100) 24(225,100) 25(275,100)
OSCSC500X320X110-4N [mm]
  rect 1.2x1.8 smd: 1(-1.2,2) 2(-1.2,-2) 3(1.2,-2) 4(1.2,2)
  silkscreen extent -2.15,2.95 -1.95,3.15
QFN50P450X350X100-21N [mm]
  rect 0.26x0.9 smd: 1(-0.75,2.185) 10(-0.75,-2.185) 11(0.75,-2.185) 20(0.75,2.185)
  rect 0.9x0.26 smd: 2(-1.685,1.75) 3(-1.685,1.25) 4(-1.685,0.75) 5(-1.685,0.25) 6(-1.685,-0.25) 7(-1.685,-0.75) 8(-1.685,-1.25) 9(-1.685,-1.75) 12(1.685,-1.75) 13(1.685,-1.25) 14(1.685,-0.75) 15(1.685,-0.25) 16(1.685,0.25) 17(1.685,0.75) 18(1.685,1.25) 19(1.685,1.75)
  rect 2.07x3.07 smd: 21(0,0)
  silkscreen extent -1.75,-2.25 1.75,3.21
QFN50P500X500X100-32N [mil]
  rect 32x12 smd: 1(-98,69) 2(-98,49) 3(-98,30) 4(-98,10) 5(-98,-10) 6(-98,-30) 7(-98,-49) 8(-98,-69) 17(98,-69) 18(98,-49) 19(98,-30) 20(98,-10) 21(98,10) 22(98,30) 23(98,49) 24(98,69)
  rect 12x32 smd: 9(-69,-98) 10(-49,-98) 11(-30,-98) 12(-10,-98) 13(10,-98) 14(30,-98) 15(49,-98) 16(69,-98) 25(69,98) 26(49,98) 27(30,98) 28(10,98) 29(-10,98) 30(-30,98) 31(-49,98) 32(-69,98)
  rect 124x124 smd: 33(0,0)
  silkscreen extent -101,-101 101,101
QFP80P900X900X120-32N [mm]
  rect 1.5x0.55 smd: 1(-4.3,2.8) 2(-4.3,2) 3(-4.3,1.2) 4(-4.3,0.4) 5(-4.3,-0.4) 6(-4.3,-1.2) 7(-4.3,-2) 8(-4.3,-2.8) 17(4.3,-2.8) 18(4.3,-2) 19(4.3,-1.2) 20(4.3,-0.4) 21(4.3,0.4) 22(4.3,1.2) 23(4.3,2) 24(4.3,2.8)
  rect 0.55x1.5 smd: 9(-2.8,-4.3) 10(-2,-4.3) 11(-1.2,-4.3) 12(-0.4,-4.3) 13(0.4,-4.3) 14(1.2,-4.3) 15(2,-4.3) 16(2.8,-4.3) 25(2.8,4.3) 26(2,4.3) 27(1.2,4.3) 28(0.4,4.3) 29(-0.4,4.3) 30(-1.2,4.3) 31(-2,4.3) 32(-2.8,4.3)
  silkscreen extent -3.4,-3.4 3.4,3.4
R_14 [mil]
  rect 86x22 smd: 1(-93,150) 2(-93,100) 3(-93,50) 4(-93,0) 5(-93,-50) 6(-93,-100) 7(-93,-150) 8(93,-150) 9(93,-100) 10(93,-50) 11(93,0) 12(93,50) 13(93,100) 14(93,150)
  silkscreen extent -44,-172 156,172, body extent 0,0 10,10, height 10
RNC0014A [mm]
  rect 1.79x0.22 smd paste-0.882 mask+0.051: 1(-0.555,0.49) 2(-0.555,0) 3(-0.555,-0.49)
  rect 0.24x0.6 smd paste+0 mask+0.051: 4(-0.75,-1.4) 5(-0.25,-1.4) 6(0.25,-1.4) 7(0.75,-1.4) 11(0.75,1.4) 12(0.25,1.4) 13(-0.25,1.4) 14(-0.75,1.4)
  rect 0.6x0.24 smd paste+0 mask+0.051: 8(1.15,-0.5) 9(1.15,0) 10(1.15,0.5)
  silkscreen extent -1.45,-1.7 1.45,1.7, body extent 0,0 0.25,0.25, height 0.25
SOIC127P500X600-8N [mm]
  rect 0.6x2.2 smd: 1(-1.905,-2.6) 2(-0.635,-2.6) 3(0.635,-2.6) 4(1.905,-2.6) 5(1.905,2.6) 6(0.635,2.6) 7(-0.635,2.6) 8(-1.905,2.6)
  silkscreen extent -2.4,-1.9 2.4,1.9
SOIC127P1032X265-20N [mm]
  rect 2x0.6 smd: 1(-4.65,5.715) 2(-4.65,4.445) 3(-4.65,3.175) 4(-4.65,1.905) 5(-4.65,0.635) 6(-4.65,-0.635) 7(-4.65,-1.905) 8(-4.65,-3.175) 9(-4.65,-4.445) 10(-4.65,-5.715) 11(4.65,-5.715) 12(4.65,-4.445) 13(4.65,-3.175) 14(4.65,-1.905) 15(4.65,-0.635) 16(4.65,0.635) 17(4.65,1.905) 18(4.65,3.175) 19(4.65,4.445) 20(4.65,5.715)
  silkscreen extent -3.32,-6.4 3.32,6.4
"SON50P150X150X80-6N - duplicate1" [mm]
  rect 1.02x0.27 smd: 1(-0.59,0.5)
  rect 0.94x0.27 smd: 2(-0.63,0) 3(-0.63,-0.5) 4(0.63,-0.5) 5(0.63,0) 6(0.63,0.5)
  silkscreen extent -1.2,0.9 -1.06,1.04
SOP65P640X120-14N [mil]
  rect 58x14 smd: 1(-115,77) 2(-115,51) 3(-115,26) 4(-115,0) 5(-115,-26) 6(-115,-51) 7(-115,-77) 8(115,-77) 9(115,-51) 10(115,-26) 11(115,0) 12(115,26) 13(115,51) 14(115,77)
  silkscreen extent -89,-100 89,100
SOP65P780X200-28N [mil]
  rect 65x17 smd: 1(-143,166) 2(-143,141) 3(-143,115) 4(-143,90) 5(-143,64) 6(-143,38) 7(-143,13) 8(-143,-13) 9(-143,-38) 10(-143,-64) 11(-143,-90) 12(-143,-115) 13(-143,-141) 14(-143,-166) 15(143,-166) 16(143,-141) 17(143,-115) 18(143,-90) 19(143,-64) 20(143,-38) 21(143,-13) 22(143,13) 23(143,38) 24(143,64) 25(143,90) 26(143,115) 27(143,141) 28(143,166)
  silkscreen extent -110,-207 110,207
SOT65P210X110-6N [mil]
  rect 46x14 smd: 1(-41,26) 2(-41,0) 3(-41,-26) 4(41,-26) 5(41,0) 6(41,26)
  silkscreen extent -5,30 5,31
SW415-ND [mm]
  rect 1.55x1.3 smd: 1(-3.2,1.6) 1(3.2,1.6) 2(-3.2,-1.6) 2(3.2,-1.6)
TO254P1435X464-3N [mm]
  rect 2.8x1.05 smd: 1(-6.19,2.54) 2(-6.19,-2.54)
  rect 5.08x8.33 smd: 3(3.53,0)
  rect 1.91x10.8 smd: 3(7.025,0)
  silkscreen extent -7.65,-5.21 5.8,5.21

## Part data
1 2 4 5 8 10 11 13 14 17 19 RcompA1 RcompA2 RlimA1 RlimA2: library part Res2, "Resistor", LatestRevisionDate=17-Jul-2002, LatestRevisionNote="Re-released for DXP Platform.", PackageDescription="Axial Device, Thru-Hole; 2 Leads; 0.4 in Pin Spacing", PackageReference=AXIAL-0.4, Published=8-Jun-2000, Publisher="Altium Limited"
3 6 7 9 12 15 16 18 C42 C43 Ccomp1 Ccomp2 Cin3 Cin4 CinA1 CinA2 CvccA1 CvccA2: library part Cap, "Capacitor", LatestRevisionDate=17-Jul-2002, LatestRevisionNote="Re-released for DXP Platform.", PackageDescription="Radial Cap, Thru-Hole; 2 Leads; 0.3 in Pin Spacing", PackageReference=RAD-0.3, Published=8-Jun-2000, Publisher="Altium Limited"
3V3 D12: "Typical RED, GREEN, YELLOW, AMBER GaAs LED", LatestRevisionDate=17-Jul-2002, LatestRevisionNote="Re-released for DXP Platform.", PackageDescription="SM LED; 2 Flat Leads", PackageReference=3.2X1.6X1.1, PackageVersion=Feb-2002, Published=8-Jun-2000, Publisher="Altium Limited"
5V R2 R3 R4 R5 R6 R7 R8 R9 R10 R11 R12 R13 R15 R16 R17 R18 R19 R21 R22 R23 R24 R25 R26 R40 R41 R42 R43 R44 R45 R46 R47 R48 R49 Rfbb1 Rfbb2: "Resistor", Published=8-Jun-2000, Publisher="Altium Limited"
  5V R2 R3 R4 R5 R6 R7 R8 R9 R10 R11 R12 R13 R15 R16 R17 R18 R19 R25 R26 R44 R45 R46 R47 R48 R49: LatestRevisionDate=29-May-2009, LatestRevisionNote="IPC-7351 Footprint Added.", PackageDescription="Chip Resistor", PackageReference=J1-0603
  R21 R22 R23 R24 R40 R41 R42 R43 Rfbb1 Rfbb2: LatestRevisionDate=17-Jul-2002, LatestRevisionNote="Re-released for DXP Platform.", PackageDescription="Axial Device, Thru-Hole; 2 Leads; 0.3 in Pin Spacing", PackageReference=AXIAL-0.3
20 22 R1 R14 R33: library part Res3, "30K Pull-up resistor for RST. See page", LatestRevisionDate=29-May-2009, LatestRevisionNote="IPC-7351 Footprint Added.", PackageDescription="Chip Resistor", PackageReference=J1-0603, Published=8-Jun-2000, Publisher="Altium Limited"
*1: "Voltage Reference", Supplier Part Number 1=296-22203-5-ND, Supplier 1=Digi-Key
*2: "ADC", Supplier Part Number 1=296-25843-6-ND, Supplier 1=Digi-Key
*5 *6 *7 *8 *9 *10 *30 U11: "Current monitor", Supplier Part Number 1=296-38956-6-ND, Supplier 1=Digi-Key
  U11: ComponentLink1Description="IC Current Monitor", ComponentLink1URL=https://www.digikey.ca/product-detail/en/texas-instruments/INA214AIDCKR/296-38956-1-ND/5143051
*11 *12 *13 *16 *17 *18 *20 *21 *23 *25 *26 *27 *29: "PV Diode"
*14 *22: "Op-amps", Supplier Part Number 1=ADA4891-4ARZ-R7DKR-ND, Supplier 1=Digi-Key
*15 *19 *24 *28 Q1 Q2: "MOSFET"
  Q1 Q2: ComponentLink1Description="N-Channel Mosfet", ComponentLink1URL=https://www.digikey.ca/product-detail/en/infineon-technologies/BSC026NE2LS5ATMA1/BSC026NE2LS5ATMA1DKR-ND/6564538
+BATT1 -BATT1: library part "Header 4", "Header, 4-Pin", ComponentLink1Description="Hirose DF14-4P-1.25H(55) Right Angle", ComponentLink1URL=https://www.digikey.ca/product-detail/en/hirose-electric-co-ltd/DF14-4P-1.25H-55/H10317-ND/964472, LatestRevisionDate=17-Jul-2002, LatestRevisionNote="Re-released for DXP Platform.", Publisher="Altium Limited"
BB1 BB2: "Buck-boost converter", Supplier Part Number 1=296-42036-6-ND, Supplier 1=Digi-Key
BT1 BT2: "Boost converter"
C1 C2 C3 C4 C5 C6 C7 C8 C9 C10 C11 C12 C13 C14 C15 C17 C18 C19 C22 C23 C24 C25 C29 C30 C31 C32 C35 C35 C35 C36 C37 C40 C41 C44: "Capacitor (Semiconductor SIM Model)", LatestRevisionDate=29-May-2009, LatestRevisionNote="IPC-7351 Footprint Added.", PackageDescription="Chip Capacitor", PackageReference=C1206, Published=8-Jun-2000, Publisher="Altium Limited"
C20 C21 C26 C27 C33 C34 C38 C39: library part "Cap Semi", "Capacitor (Semiconductor SIM Model)", LatestRevisionDate=29-May-2009, LatestRevisionNote="IPC-7351 Footprint Added.", PackageDescription="Chip Capacitor", PackageReference=C1206, Published=8-Jun-2000, Publisher="Altium Limited"
C28 Cin1 Cin2 Cout1 Cout2 Coutx1 Coutx2: "Capacitor", LatestRevisionDate=17-Jul-2002, LatestRevisionNote="Re-released for DXP Platform.", PackageDescription="Radial Cap, Thru-Hole; 2 Leads; 0.3 in Pin Spacing", PackageReference=RAD-0.3, Published=8-Jun-2000, Publisher="Altium Limited"
"DEP. SWITCH1" "DEP. SWITCH / RBF PIN1": "Header, 4-Pin", ComponentLink1Description="Hirose DF14-4P-1.25H(55) Right Angle", ComponentLink1URL=https://www.digikey.ca/product-detail/en/hirose-electric-co-ltd/DF14-4P-1.25H-55/H10317-ND/964472, LatestRevisionDate=17-Jul-2002, LatestRevisionNote="Re-released for DXP Platform.", Publisher="Altium Limited"
EPS OBC: "Double-Pole, Double-Throw Switch", LatestRevisionDate=17-Jul-2002, LatestRevisionNote="Re-released for DXP Platform.", PackageDescription="Switch; 6 Leads", PackageReference=DPDT-6, Published=24-Mar-1999, Publisher="Altium Limited"
EPS "OBC 32M1": "Atmel 8-bit AVR microcontroller.", Supplier Part Number 1=ATMEGA32M1-AURCT-ND, Supplier 1=Digi-Key
EPS "RESET OBC": "Switch", LatestRevisionDate=17-Jul-2002, LatestRevisionNote="Re-released for DXP Platform.", PackageDescription="Switch; 2 Leads", PackageReference=SPST-2, Published=24-Mar-1999, Publisher="Altium Limited"
EPS OBC: library part "Header 3X2", "2x3 through-hole programming header, IDC", LatestRevisionDate=17-Jul-2002, LatestRevisionNote="Re-released for DXP Platform.", Publisher="Altium Limited"
"EPS CAN" "OBC CAN": "3.3V CAN Transceiver with Standby Mode, Loop-back 8-SOIC -40 to 125", Package="SOIC-8 Texas Instruments", Supplier Part Number 1=296-14639-5-ND, Availability=Good, MF="Texas Instruments", MP=SN65HVD233D, Price="2.39 USD", SnapEDA_Link=https://www.snapeda.com/parts/SN65HVD233D/Texas%20Instruments/view-part/?ref=snap, Supplier 1=Digi-Key
"EPS MEM" OBC-MEM1 OBC-MEM2 OBC-MEM3: "2.5V/3.0V 16 Mbit Serial Quad I/O (SQI) Flash Memory", Supplier Part Number 1=SST26VF016B-104I/SN-ND, ComponentLink1Description=SST25VF016B, ComponentLink1URL=https://www.digikey.ca/product-detail/en/microchip-technology/SST26VF016B-104I-SN/SST26VF016B-104I-SN-ND/5033651, Supplier 1=Digi-Key
"EPS PEX": "16 bit I/O expander with SPI interface.", Supplier Part Number 1=MCP23S17-E/SS-ND, Supplier 1=Digi-Key
"EPS RST" "EPS RX" "EPS RXCAN" "EPS TX" "EPS TXCAN" "OBC RST" "OBC RX" "OBC RXCAN" "OBC TX" "OBC TXCAN": library part LED2, "Typical RED, GREEN, YELLOW, AMBER GaAs LED", LatestRevisionDate=17-Jul-2002, LatestRevisionNote="Re-released for DXP Platform.", PackageDescription="SM LED; 2 Flat Leads", PackageReference=3.2X1.6X1.1, PackageVersion=Feb-2002, Published=8-Jun-2000, Publisher="Altium Limited"
J1: "Receptacle Assembly, 25 Position, Right Angle", PackageDocument=U, ComponentLink1Description="Mini-D25 - Molex, LLC 0836149012", ComponentLink1URL=https://www.digikey.ca/product-detail/en/molex-llc/0836149012/WM2144-ND/1867000, DatasheetDocument=19-Mar-1999, Gender=Receptacle, LatestRevisionDate=17-Jul-2002, LatestRevisionNote="Re-released for DXP Platform.", Orientation="Right Angle", PackageReference=787202, Positions=25, Published=15-Jun-2001, Publisher="Altium Limited"
LA1 LA2: library part Inductor, "Inductor", Code_IEC=1005, Code_JEITA=0402, LatestRevisionDate=29-May-2009, LatestRevisionNote="IPC-7351 Footprint Added.", PackageDescription="Chip Inductor", PackageReference=0402-A, Published=8-Jun-2000, Publisher="Altium Limited"
"OBC TX": library part "Header 4X2", "Header, 4-Pin, Dual row", LatestRevisionDate=17-Jul-2002, LatestRevisionNote="Re-released for DXP Platform.", Publisher="Altium Limited"
P2 P3 P7: library part "Header 2X2", "Header, 2-Pin, Dual row", LatestRevisionDate=17-Jul-2002, LatestRevisionNote="Re-released for DXP Platform.", Publisher="Altium Limited"
P5: "Header, 10-Pin", LatestRevisionDate=17-Jul-2002, LatestRevisionNote="Re-released for DXP Platform.", Publisher="Altium Limited"
P8 P9 P10 P11: "Header, 5-Pin", LatestRevisionDate=17-Jul-2002, LatestRevisionNote="Re-released for DXP Platform.", Publisher="Altium Limited"
R27 R28 R29 R30 R31 R32 R34 R35 R36 R37 R38 R39: library part Res3, "Resistor", LatestRevisionDate=29-May-2009, LatestRevisionNote="IPC-7351 Footprint Added.", PackageDescription="Chip Resistor", PackageReference=J1-0603, Published=8-Jun-2000, Publisher="Altium Limited"
"Real Time Clock": "SPI bus RTC with integrated crystal and SRAM", Supplier Part Number 1=DS3234SN#-ND, Supplier 1=Digi-Key
Rfbt1 Rfbt2: library part Res1, "Resistor", LatestRevisionDate=17-Jul-2002, LatestRevisionNote="Re-released for DXP Platform.", PackageDescription="Axial Device, Thru-Hole; 2 Leads; 0.3 in Pin Spacing", PackageReference=AXIAL-0.3, Published=8-Jun-2000, Publisher="Altium Limited"
U2 U5: "Six element 1-bit non-inverting open-drain buffer.", Supplier Part Number=296-27916-1-ND, Supplier=Digi-Key
U12: library part BQ2972, "Battery protection", ComponentLink1Description="Charge Controller", ComponentLink1URL=https://www.digikey.com/product-detail/en/texas-instruments/BQ29729DSET/296-44131-1-ND/6005144
L1 L2: Code_IEC=1005, Code_JEITA=0402, LatestRevisionDate=29-May-2009, LatestRevisionNote="IPC-7351 Footprint Added.", PackageDescription="Chip Inductor", PackageReference=0402-A, Published=8-Jun-2000, Publisher="Altium Limited"

## Free pads (board coordinates)
  round 6.35 hole 3.18: ""(5.08,5.08) ""(5.08,85.09) ""(90.81,8.89) ""(90.81,82.55)

## Via types
v1: diameter 0.6, hole 0.3, Top Signal to Bottom Signal, 390 vias
v2: diameter 1.27, hole 0.711, Top Signal to Bottom Signal, 24 vias
v3: diameter 1, hole 0.5, Top Signal to Bottom Signal, 6 vias
v4: diameter 2.794, hole 2.794, Top Signal to Bottom Signal, 2 vias

## Nets (pads, with @x,y where several pads share a name; then routed paths per layer and width w, separated by ;. In a path a pad name is that pad's centre, name@x,y a point inside that pad or via, vN(x,y) a via of type N, cw(c..) or ccw(c..) an arc to the next point about the centre after c; other vN are vias at no path point)
+3V3: 5V.1 20.1 22.2 "EPS CAN.3" "EPS MEM.3" "EPS MEM.7" "EPS MEM.8" "EPS PEX.9" "EPS RST.1" "EPS RX.1" "EPS RXCAN.1" "EPS TX.1" "EPS TXCAN.1" "OBC 32M1.4" "OBC 32M1.19" "OBC CAN.3" "OBC RST.1" "OBC RX.1" "OBC RXCAN.1" "OBC TX.1"@2.578,41.25 "OBC TXCAN.1" "Real Time Clock.4" "Real Time Clock.6" *1.2 *2.21 *2.28 *2.32 *5.1 *5.3 *5.5 *6.1 *6.3 *6.5 *7.1 *7.3 *8.1 *8.3 *9.1 *9.3 *10.1 *10.3 *30.1 *30.3 C1.1 C2.2 C17.2 C18.2 C22.2 C23.2 C24.2 C29.2 C30.2 C31.2 C32.2 C35.1 C36.2 C37.2 C40.1 C41.2 EPS.2@55,65.8 EPS.4@23.5,45.7 EPS.19 J1.14 OBC-MEM1.3 OBC-MEM1.7 OBC-MEM1.8 OBC-MEM2.3 OBC-MEM2.7 OBC-MEM2.8 OBC-MEM3.3 OBC-MEM3.7 OBC-MEM3.8 OBC.2@55.74,60 P5.2 R1.2 R7.1 R10.1 R14.2 R21.1 R23.2 R24.2 R33.2 U2.14 U5.14 U11.1 U11.3 | length 287
  Top Signal w0.254: v1(4.6,34.2) 5,34.2 5.8,33.4 v1(5.8,32.6) ; v1(22.521,65.279) 22.6,65.2 26.6,65.2 v1(27.4,64.4) ; *2.21@28.854,53.111 28.883,53.082 28.883,52.344 29.626,51.6 v1(30.6,51.6) 32,51.6 32.4,51.2 33.2,51.2 v1@33.3,51.3 ; *2.28@31.089,55.346 31.118,55.375 31.631,55.375 33.856,57.6 ; *2.32@31.089,57.353 31.737,58 32,58 v1(32.2,58.2) ; v1@33.4,51.2 v1(33.4,51.4) ; v1(33.8,58.6) 33.963,58.763 34.8,58.763 34.319,58.282 34.319,58.063 33.856,57.6 ; C1.1@34.6,57.1 34.1,57.6 33.856,57.6 ; *1.2@41.223,59.075 43.975,59.075 C2.2@44.2,59.3 v1(44.2,57.6) ; v1@45.4,80.6 v1(45.4,80.4) 45.4,79.416 ; *9.3@46.959,77.74 45.976,77.74 45.621,77.384 ; *9.1@46.959,79.06 45.976,79.06 45.621,79.416 45.4,79.416 ; v1(48,14.2) 48,11.6 48.6,11 v1(48.8,11) ; *7.1@51.441,72.34 51.462,72.319 52.272,72.319 ; *7.3@51.441,73.66 51.462,73.681 53.082,73.681 53.481,73.282 53.481,72.718 53.082,72.319 52.272,72.319 ; EPS.2@55,65.8 54.214,66.586 53.935,66.586 53.564,66.957 51.999,66.957 51.448,67.507 50.535,67.507 50.535,68.07 49.87,68.735 49.67,68.735 47.995,70.41 47.666,70.41 45.621,72.455 45.621,77.384 ; *10.1@55.559,6.06 56.34,6.06 56.34,5.843 56.47,5.713 56.47,5.087 56.34,4.957 56.34,4.74 *10.3@55.559,4.74 55.4,4.581 55.6,4.381 v1(55.6,3.6) ; *8.3@55.641,33.06 54.66,33.06 54.6,33 54.6,31.8 54.66,31.74 *8.1@55.641,31.74 55.641,30.959 55.8,30.8 v1(56.6,30.8) ; v1(58,66.6) 57.8,66.6 56.127,68.273 54.49,68.273 53.58,69.182 53.218,69.182 52.272,70.128 52.272,72.319 ; U11.1@66.441,20.94 66.441,21.095 65.722,21.095 65.4,21.417 65.4,22.2 65.46,22.26 U11.3@66.441,22.26 v1(67.2,23.019) ; 45.4,79.416 44.779,79.416 44.163,78.8 44.163,77.837 44.616,77.384 45.621,77.384
  Top Signal w0.762: v2(54.4,39.8) 54.451,39.851 59.415,39.851 59.466,39.8 60,39.8 60.25,40.05 P5.2@62.2,40.05
  Bottom Signal w0.254: v1(0.8,12.6) 0.8,12.4 1,12.2 C32.2@1,11.5 ; v1(1.4,59.6) 2.573,59.6 ; v1(1.45,41.25) 2.578,41.25 ; v1(1.5,64.7) 2.573,64.7 ; v1(1.6,62.2) 2.573,62.2 ; v1(1.61,43.81) 2.578,43.81 ; v1(1.63,46.37) 2.578,46.37 ; v1(1.69,51.49) 2.478,51.49 ; v1(1.73,48.93) 2.578,48.93 ; v1(1.8,35.8) 1.8,36.5 C37.2@2,36.7 C36.2@3.6,36.7 ; 2,69.2 2,68.9 ; 2.573,67.25 2,67.823 v1(2,68.2) 2,68.9 ; v1(2.6,12.6) C31.2@2.6,11.5 3.2,12.1 3.2,13.454 3.373,13.627 4.73,13.627 5.565,12.792 5.565,12.2 ; 2.7,69.6 2,68.9 ; v1(3.6,35.8) C36.2@3.6,36.7 ; v1(4.6,34.2) 4.6,35.7 C36.2@3.6,36.7 ; v1(5.8,32.6) 5.8,30.635 6.035,30.4 ; R7.1@7.35,54.2 v1(8.6,54.2) ; 5V.1@7.4,56.8 9.2,58.6 ; v1(11.4,21.8) 11.4,21.123 U2.14@12.044,20.479 ; R14.2@13.05,43.6 13.05,44.22 J1.14@14.2,45.37 ; C18.2@21,20.3 21.1,20.2 22.9,20.2 v1(24.8,20.2) ; v1(22.521,65.279) U5.14@22.521,68.444 ; C23.2@23.1,48.4 23.5,48 23.5,44.1 23.4,44 v1(23.4,44.4) ; v1(24,6.8) 25.9,6.8 C35.1@26,6.7 26.995,5.705 OBC-MEM1.8@27.8,5.705 OBC-MEM1.7@27.8,4.435 ; v1(25.4,39.6) 25.1,39.3 25.1,35.5 25.2,35.4 26.6,35.4 27,35 27,32.6 26.7,32.3 C24.2@26.067,32.3 ; R10.1@26.2,65.25 27.05,64.4 v1(27.4,64.4) ; C40.1@26.6,54.5 27.465,53.635 28.6,53.635 28.765,53.8 29.6,53.8 30.2,53.2 30.2,52 v1(30.6,51.6) ; v1(29.2,37) 29.2,36.761 29.454,36.507 29.454,34.496 R1.2@30.2,33.75 ; 29.2,53.635 29.235,53.6 29.8,53.6 ; v1(29.8,21.8) 31.5,21.8 32.6,21.8 33.3,22.5 C17.2@33.6,22.5 ; v1(32.2,58.2) 32.4,58.2 32.8,58.6 v1(33.8,58.6) ; 22.2@32.8,8.35 v1(33.75,8.35) ; OBC-MEM1.3@33,3.165 34.765,3.165 35.835,4.235 37.2,4.235 37.2,6.3 36.8,6.7 36.5,6.4 v1(35.6,6.4) ; 33.8,51.095 33.8,52.365 ; 34.4,52.365 34.435,52.4 ; 35.232,68.835 35.278,68.881 37.175,68.881 37.2,68.855 ; C22.2@37.2,69.7 37.2,68.855 ; v1(37.6,66) 37.6,68.108 37.946,68.454 37.545,68.855 37.2,68.855 ; OBC-MEM2.3@42.4,3.265 42.7,3.265 42.735,3.3 43.7,3.3 44.8,4.4 45.8,4.4 45.8,5.505 45.295,5.505 C35.1@44.1,6.7 ; R33.2@43.15,7.2 43.65,6.7 v1(45.7,6.7) ; v1(48,14.2) 50.2,14.2 51.235,15.235 51.235,21.165 49.85,21.165 49.358,21.165 48.523,22 48.523,22.947 49.281,23.705 49.85,23.705 ; v1(48.8,11) 48.95,10.85 48.95,9 48.8,8.85 20.1@49.65,8 ; OBC-MEM3.3@51,2.965 52.714,2.965 53.799,1.88 53.799,1.602 53.8,1.6 v1(54,1.6) ; C41.2@53.3,70.4 C41.2@53,70.1 54.1,70.1 55.1,71.1 55.119,71.1 *30.1@55.759,71.74 *30.1@55.828,71.67 ; EPS.2@55,65.8 56,66.8 56,71.498 *30.1@55.828,71.67 ; *30.3@55.759,73.06 56.66,73.06 56.66,72.723 56.67,72.713 56.67,72.087 56.66,72.077 56.66,71.67 *30.1@55.828,71.67 ; R24.2@65.8,33.3 67.5,33.3 68.2,34 *6.5@68.2,35.759 68.2,36.8 ; C30.2@65.8,37.8 65.841,37.841 *6.1@67.54,37.841 67.54,36.86 67.6,36.8 68.2,36.8 ; v1(67.2,23.019) 67.94,22.279 *5.1@67.94,22.041 67.94,21.06 68,21 68.6,21 ; R23.2@68,17.5 68.6,18.1 *5.5@68.6,19.959 68.6,21 ; *6.3@68.86,37.841 68.86,36.86 68.8,36.8 68.2,36.8 ; C29.2@71,22 70.959,22.041 *5.3@69.26,22.041 69.26,21 68.6,21
  Bottom Signal w0.508: v1(54.4,48) 57.1,48 R21.1@57.2,48.1 ; v2(56.065,10.8) 59.2,10.8 61.6,13.2 61.6,16.8 62.3,17.5 R23.2@68,17.5 ; v2@56.4,33.6 v2(56.4,33.549) 56.4,33 57,32.4 61.6,32.4 62.5,33.3 63.557,33.3 63.665,33.192 65.692,33.192 R24.2@65.8,33.3
  other v1: 49,9
+5V: 1.2 "OBC TX.1"@90.4,42.7 "OBC TX.2"@87.86,42.7 *2.15 *14.4 *22.4 *30.5 C12.1 J1.13 J1.21 J1.22 P5.7 | length 213.1
  Top Signal w0.254: v1(7.6,47.6) 7.6,50.2 11.66,54.26 J1.21@14.2,54.26 J1.22@14.2,55.53 14.93,55.53 15.4,56 15.4,58.658 16.717,59.975 J1.13@16.74,59.975 ; v1(9.2,58.6) 9.537,58.6 12.802,61.865 ; v1(10.8,44.6) 10.8,44.447 10.4,44.047 10.827,43.62 10.827,42.171 10.4,41.744 10.4,38.363 10.881,37.882 10.881,37.156 11.118,36.919 12.976,36.919 13.318,36.577 13.882,36.577 14.14,36.577 14.682,37.119 17.082,37.119 17.763,37.8 27.222,37.8 27.257,37.765 29.489,37.765 30.081,37.173 30.645,37.173 31.044,37.572 31.044,37.844 31.2,38 30.4,38.8 *22.4@30.4,39.638 ; v1(23,51.6) 23.119,51.481 23.882,51.481 24.281,51.082 24.281,48.223 23.619,47.561 23.619,46.918 24.018,46.519 24.835,46.519 25.202,46.886 26.686,46.886 27,47.2 27,48.2 27.937,49.137 25.681,51.393 25.681,51.482 25.2,51.963 25.2,54.183 25.372,54.355 *2.15@26.111,54.355 ; v1(24.8,58.8) 24.8,61.137 25.331,61.668 25.331,62.232 24.8,62.763 v1(24.8,64.2) ; v1(24.8,66.2) 26.2,67.6 v1(26.2,68.8) ; *14.4@42.39,64.8 42.39,63.816 42.4,63.816 42.4,63.621 41.902,63.123 41.902,62.4 42.184,62.118 42.184,61.584 40.379,61.584 40.363,61.6 39.6,61.6 39.535,61.535 39.535,60.53 39.4,60.395 39.4,59.963 39.681,59.682 39.681,59.118 40.032,58.767 40.032,58.048 40.2,57.88 40.2,57.763 40.119,57.682 40.119,57.118 40.2,57.037 40.2,55.742 39.929,55.471 52.305,55.471 52.355,55.421 52.708,55.421 52.881,55.248 52.881,54.682 52.857,54.658 52.857,52.38 54.156,51.081 54.482,51.081 54.894,50.669 55.494,50.669 56.044,50.119 57.531,50.119 58.727,51.315 58.727,53.585 58.535,53.777 58.865,53.777 58.865,55.284 59.2,55.619
  Top Signal w0.762: v3(8.2,71) 8.2,70 7.8,69.6 10.011,67.389 10.011,64.656 12.802,61.865 14.85,61.865 J1.13@16.74,59.975 ; P5.7@62.2,46.3 59.2,46.3 59.2,53.478 58.865,53.813 58.865,54.587 59.2,54.922 59.2,55.619 60.511,56.93 65.052,56.93 68.2,60.078 v2(68.2,64.4) ; 87.86,42.7 90.4,42.7 91.9,42.7 92.6,43.4 92.6,55.4 90.2,57.8 90.2,59.757 91.6,61.157 v3(91.6,63.8)
  Bottom Signal w0.254: v1(7.6,47.6) 7.8,47.6 v1(10.8,44.6) ; v1(23,51.6) 22.919,51.681 22.919,52.719 23.692,53.492 23.692,57.534 24.8,58.642 v1(24.8,58.8) ; v1(24.8,64.2) v1(24.8,66.2) ; *30.5@57.841,72.4 57.956,72.285 v1(59.315,72.285)
  Bottom Signal w0.508: v2(58.2,75.2) 1.2@60.3,75.2
+PACK: *29.3 BB1.4 BB1.5 BB1.6 BB1.7 BB1.8 BB2.4 BB2.5 BB2.6 BB2.7 BB2.8 BT1.9 BT2.9 Cin1.2 Cin2.2 Cin3.2 Cin4.2 CinA1.2 CinA2.2 J1.18 LA1.1 LA2.1 R44.1 R46.2 U11.4 | length 247.8
  Top Signal w0.254: R46.2@28.8,67.35 28.955,67.35 31.119,69.514 31.119,69.682 31.518,70.081 32.082,70.081 32.201,69.962 34.075,69.962 36.518,67.519 38.509,67.519 39.609,66.419 43.941,66.419 44.266,66.094 44.266,63.296 45.081,62.482 45.081,62.356 45.518,61.919 46.239,61.919 46.8,61.358 46.8,58.758 47.953,58.758 48.921,59.726 49.526,59.726 49.529,59.729 49.529,60.468 50.261,61.2 53.599,61.2 54.609,60.19 54.609,59.532 55.272,58.869 56.37,58.869 56.871,58.368 56.887,58.384 59.453,58.384 59.637,58.2 v2(63.2,58.2) ; U11.4@64.359,22.26 64.946,22.26 64.946,22.388 67.239,24.681 71.789,24.681 *29.3@74.8,21.67
  Top Signal w0.508: J1.18@14.2,50.45 11.781,50.45 7.635,46.304 4.696,46.304 2.792,44.401 2.792,35.649 1.597,34.454 1.112,34.454 0.846,34.188 0.846,18.346 2.4,16.792 2.4,13.543 1.792,12.935 1.792,12.265 2.553,11.504 6.064,11.504 7.408,10.16 7.408,9.992 8.8,8.6 12.4,8.6 15.3,11.5 15.408,11.392 20.449,11.392 21.465,12.408 22.135,12.408 22.143,12.4 31.8,12.4 33.462,14.062 36.462,14.062 v1(36.8,14.4) ; v1(39.4,13) 43.778,13 44.759,12.019 44.8,12.06 v1(44.8,12.4)
  Top Signal w0.762: R44.1@68.106,18.175 *29.3@74.8,18.175 v2(77.4,15.575) ; *29.3@74.8,21.67 74.8,24.2 v1(75.8,25.2)
  Bottom Signal w0.254: 67.885,73.515 BT1.9@67.885,73.65 ; BB2.8@72.1,27.295 72.6,27.295 BB2.7@73,27.695 BB2.6@73,28.195 BB2.5@73,28.695 BB2.4@73,29.195 ; BB1.8@72.39,12.695 72.89,12.695 BB1.7@73.29,13.095 BB1.6@73.29,13.595 BB1.5@73.29,14.095 BB1.4@73.29,14.595
  Bottom Signal w0.508: v1(36.8,14.4) 38,14.4 v1(39.4,13) ; v1(44.8,12.4) 57.343,12.4 59.208,14.265 59.665,14.265 60,14.6 v3(60,15.2) ; v2(63.2,58.2) 63.2,63 66.992,66.792 67.135,66.792 67.608,67.265 67.608,67.408 67.885,67.685 67.885,68.6 ; 67.885,73.515 67.885,72.2 67.885,70.2 ; CinA1.2@69.5,69 68.285,69 67.885,68.6 ; Cin3.2@69.5,71 69.415,70.915 68.6,70.915 67.885,70.2 ; BB2.7@73,27.695 73.695,27.695 74.1,28.1 Cin2.2@75,28.1 76.3,28.1 76.6,27.8 76.6,26 v1(75.8,25.2) ; BB1.7@73.29,13.095 73.705,13.095 74.1,12.7 Cin1.2@74.8,12.7 v1(74.8,14.2) ; Cin4.2@81.6,65.2 81.6,66.4 82.915,67.715 BT2.9@83.166,67.715 ; 67.885,68.6 67.885,70.2
  Bottom Signal w0.762: 67.885,72.2 73.2,72.2 75.437,69.963 LA1.1@76.2,69.963 ; CinA2.2@81.6,63 80.4,63 79.4,62 ; Cin4.2@81.6,65.2 80.8,65.2 79.4,63.8 79.4,62 ; LA2.1@82.163,60 v2(79.4,60) 79.4,62
-PACK: *2.13 Q1.1 R47.1 R49.1 | length 16
  Top Signal w0.254: *2.13@26.111,55.317 *2.13@26.111,55.346 ; R47.1@61.75,20.6 62.6,19.75 v1(62.6,19.6)
  Top Signal w0.508: Q1.1@56.025,14.835 58.165,14.835 v1(58.4,14.6)
  Top Signal w0.762: Q1.1@56.025,14.835 Q1.1@56.025,13.565 Q1.1@56.025,12.295 56.025,12.07 56.591,12.07 57.335,11.326 57.335,10.4 R49.1@57.45,10.4
  Bottom Signal w0.254: v1(58.4,14.6) 58.4,15.4 61.8,18.8 v1(62.6,19.6)
CANH: "EPS CAN.7" "OBC CAN.7" J1.16 P5.8 R31.1 R38.1 | length 158.9
  Top Signal w0.254: v1(5.4,21.6) 6.8,21.6 v1(6.835,21.565) ; v1(7.8,38) 7.8,38.637 8.4,39.237 8.4,45.589 10.146,47.335 12.335,47.335 12.91,47.91 J1.16@14.2,47.91 ; v1(15.8,23.8) 16,24 52.8,24 52.728,24.072 v1(52.52,24.072) ; P5.8@62.2,47.55 69.732,47.55 70.663,48.481 71.227,48.481 72.158,47.55 74.25,47.55 74.961,46.839 74.961,41.961 v1(74.8,41.8) ; v1(63,26) 70.2,26 70.4,25.8 v1(74.8,30.2)
  Bottom Signal w0.254: v1(5.4,21.6) 5,21.6 4.977,21.623 4.977,25.2 4.765,25.2 4.765,27.765 5.4,28.4 7.2,28.4 8.2,29.4 8.2,31.363 8.184,31.379 8.184,32.221 8.779,32.816 8.779,33.174 9,33.395 R38.1@9,33.65 ; v1(7.8,38) 8,38 8.4,37.6 8.4,36.039 8.223,35.862 8.223,34.715 9,33.938 R38.1@9,33.7 ; R31.1@13.8,14.35 13.65,14.35 12.6,15.4 7.4,15.4 6.835,15.965 6.835,17.4 6.835,18.827 5.919,19.743 5.919,20.514 6.835,21.43 v1(6.835,21.565) 7.153,21.565 7.415,21.827 8.585,21.827 8.693,21.719 10.638,21.719 10.719,21.8 10.719,22.082 11.118,22.481 11.682,22.481 12.217,21.946 13.388,21.946 15.242,23.8 v1(15.8,23.8) ; v1(52.52,24.072) 52.566,24.119 53.482,24.119 54.109,24.746 59.854,24.746 60.8,23.8 60.919,23.919 61.282,23.919 61.681,24.318 61.681,24.881 62.8,26 v1(63,26) ; v1(74.8,30.2) 75.119,29.881 75.482,29.881 75.521,29.842 76.6,29.842 77.4,30.642 77.4,37.2 74.8,39.8 v1(74.8,41.8)
CANL: "EPS CAN.6" "OBC CAN.6" J1.17 P5.9 R28.1 R35.1 | length 160.5
  Top Signal w0.254: v1(7.4,39.2) 7.4,39.4 7.946,39.946 7.946,45.793 10.977,48.824 13.844,48.824 J1.17@14.2,49.18 ; v1@15.4,24.6 15.6,24.8 v1(53.2,24.8) ; v1(61,24.6) 62.674,24.6 63.355,25.281 64.882,25.281 64.963,25.2 71.2,25.2 v1(75.2,29.2) ; P5.9@62.2,48.8 64.2,48.8 64.996,48.004 69.544,48.004 70.475,48.935 71.415,48.935 72.346,48.004 74.438,48.004 75.654,46.788 v1(75.654,40.854)
  Bottom Signal w0.254: v1(7.4,39.2) 10.4,39.2 12.465,37.135 12.465,36.105 12.785,35.785 12.785,34.835 R35.1@11.8,33.85 11.8,33.2 11.8,32.65 10.616,31.466 10.616,30.979 7.583,27.946 7.096,27.946 6,26.85 6,25.235 6.035,25.2 5.919,25.2 5.919,22.4 ; R28.1@11.2,14.4 7.042,14.4 6.188,15.254 6.146,15.254 5.565,15.835 5.565,17.4 5.465,17.5 5.465,20.706 5.678,20.919 5.682,20.919 6.081,21.318 6.081,21.882 5.919,22.044 5.919,22.4 ; v1(15.2,24.576) 15.376,24.576 13.2,22.4 12.405,22.4 11.87,22.935 10.93,22.935 10.339,22.344 5.975,22.344 5.919,22.4 ; v1(53.2,24.8) 53.6,25.2 60.4,25.2 v1(61,24.6) ; v1(75.2,29.2) 76.6,29.2 78,30.6 78,38.508 v1(75.654,40.854)
EPS_MISO_A: "OBC 32M1.1" EPS.1@21.1,45.7 EPS.1@55,63.26 J1.2 OBC.1@55.74,57.46 P5.5 U2.3 U5.3 | length 183.3
  Top Signal w0.254: v1(14,68.4) 14,68.205 15.805,66.4 v1(21,66.4) ; J1.2@16.384,45.649 J1.2@16.74,46.005 ; v1(16.6,39.6) 17,39.6 v1(17.8,38.8) 17.8,40.719 16.686,40.719 16.535,40.87 16.119,41.286 16.119,42.821 17.654,44.356 17.654,45.114 17.119,45.649 17.096,45.649 J1.2@16.74,46.005 ; v1(18.6,48.6) 18.6,47.8 16.805,46.005 J1.2@16.74,46.005 ; v1(47.033,68.4) 47.223,68.4 48.023,67.6 v1(49.4,67.6) ; v1(55.2,49.8) 55.2,48.805 55.535,48.47 55.535,48.265 60,43.8 P5.5@62.2,43.8 ; v1(55.4,54.6) 55.4,57.12 OBC.1@55.74,57.46
  Bottom Signal w0.254: U2.3@13.34,26.321 13.495,26.477 13.495,27.495 14.493,28.493 14.493,32.335 14.485,32.344 14.485,36.468 14.411,36.542 14.411,38.424 15.441,39.454 16.054,39.454 16.2,39.6 v1(16.6,39.6) ; v1(14,68.4) 14,68.605 15.135,69.74 U5.3@16.679,69.74 ; J1.2@16.74,46.005 17.045,45.7 EPS.1@21.1,45.7 ; v1(17.8,38.8) 17.481,38.481 17.481,36.939 16.6,36.058 16.6,35.6 19.2,35.6 20.346,34.454 20.346,30.212 22.239,28.319 23.756,28.319 23.919,28.482 23.919,28.882 24.318,29.281 28.561,29.281 30.602,27.24 30.602,25.098 31.5,24.2 ; v1(18.6,48.6) 18.6,48.674 20.319,50.393 20.319,50.482 20.751,50.914 20.751,62.044 20.6,62.195 20.6,63.437 20.319,63.718 20.319,66.213 20.717,66.611 ; v1(21,66.4) 21.437,66.837 21.437,67.574 21.003,68.007 21.003,73.203 21.254,73.454 21.254,73.928 22.119,74.793 22.119,75.082 22.518,75.481 22.807,75.481 30.418,83.092 44.492,83.092 47.557,80.027 47.557,78.552 46.467,77.462 46.467,69.37 47.033,68.804 v1(47.033,68.4) ; v1(49.4,67.6) 49.8,67.2 50.8,67.2 51.329,66.671 51.329,65.261 52.19,64.4 55,64.4 EPS.1@55,63.26 55,62.395 56.73,60.665 56.935,60.665 56.935,60.614 56.871,60.55 56.871,59.532 56.73,59.391 56.73,57.46 OBC.1@55.74,57.46 ; v1(55.2,49.8) 55.281,49.881 55.281,50.719 54.654,51.346 54.654,51.891 54.681,51.918 54.681,52.039 54.854,52.212 54.854,52.588 54.8,52.642 54.8,52.991 55.404,53.595 55.404,54.596 v1(55.4,54.6)